# Altium PCB ALTAIR_PD_Sergeant_V26.3b.PcbDoc (part 1 of 4)
Units mm, origin at the board's own origin, x right, y up, seen from the top; angles counter-clockwise.
Board outline 74 x 56 mm, 4 copper layers (Top Layer, Layer 1, Layer 2, Bottom Layer), stack 1.675 mm thick; 209 components, 127 nets, 625 pads, 471 vias.
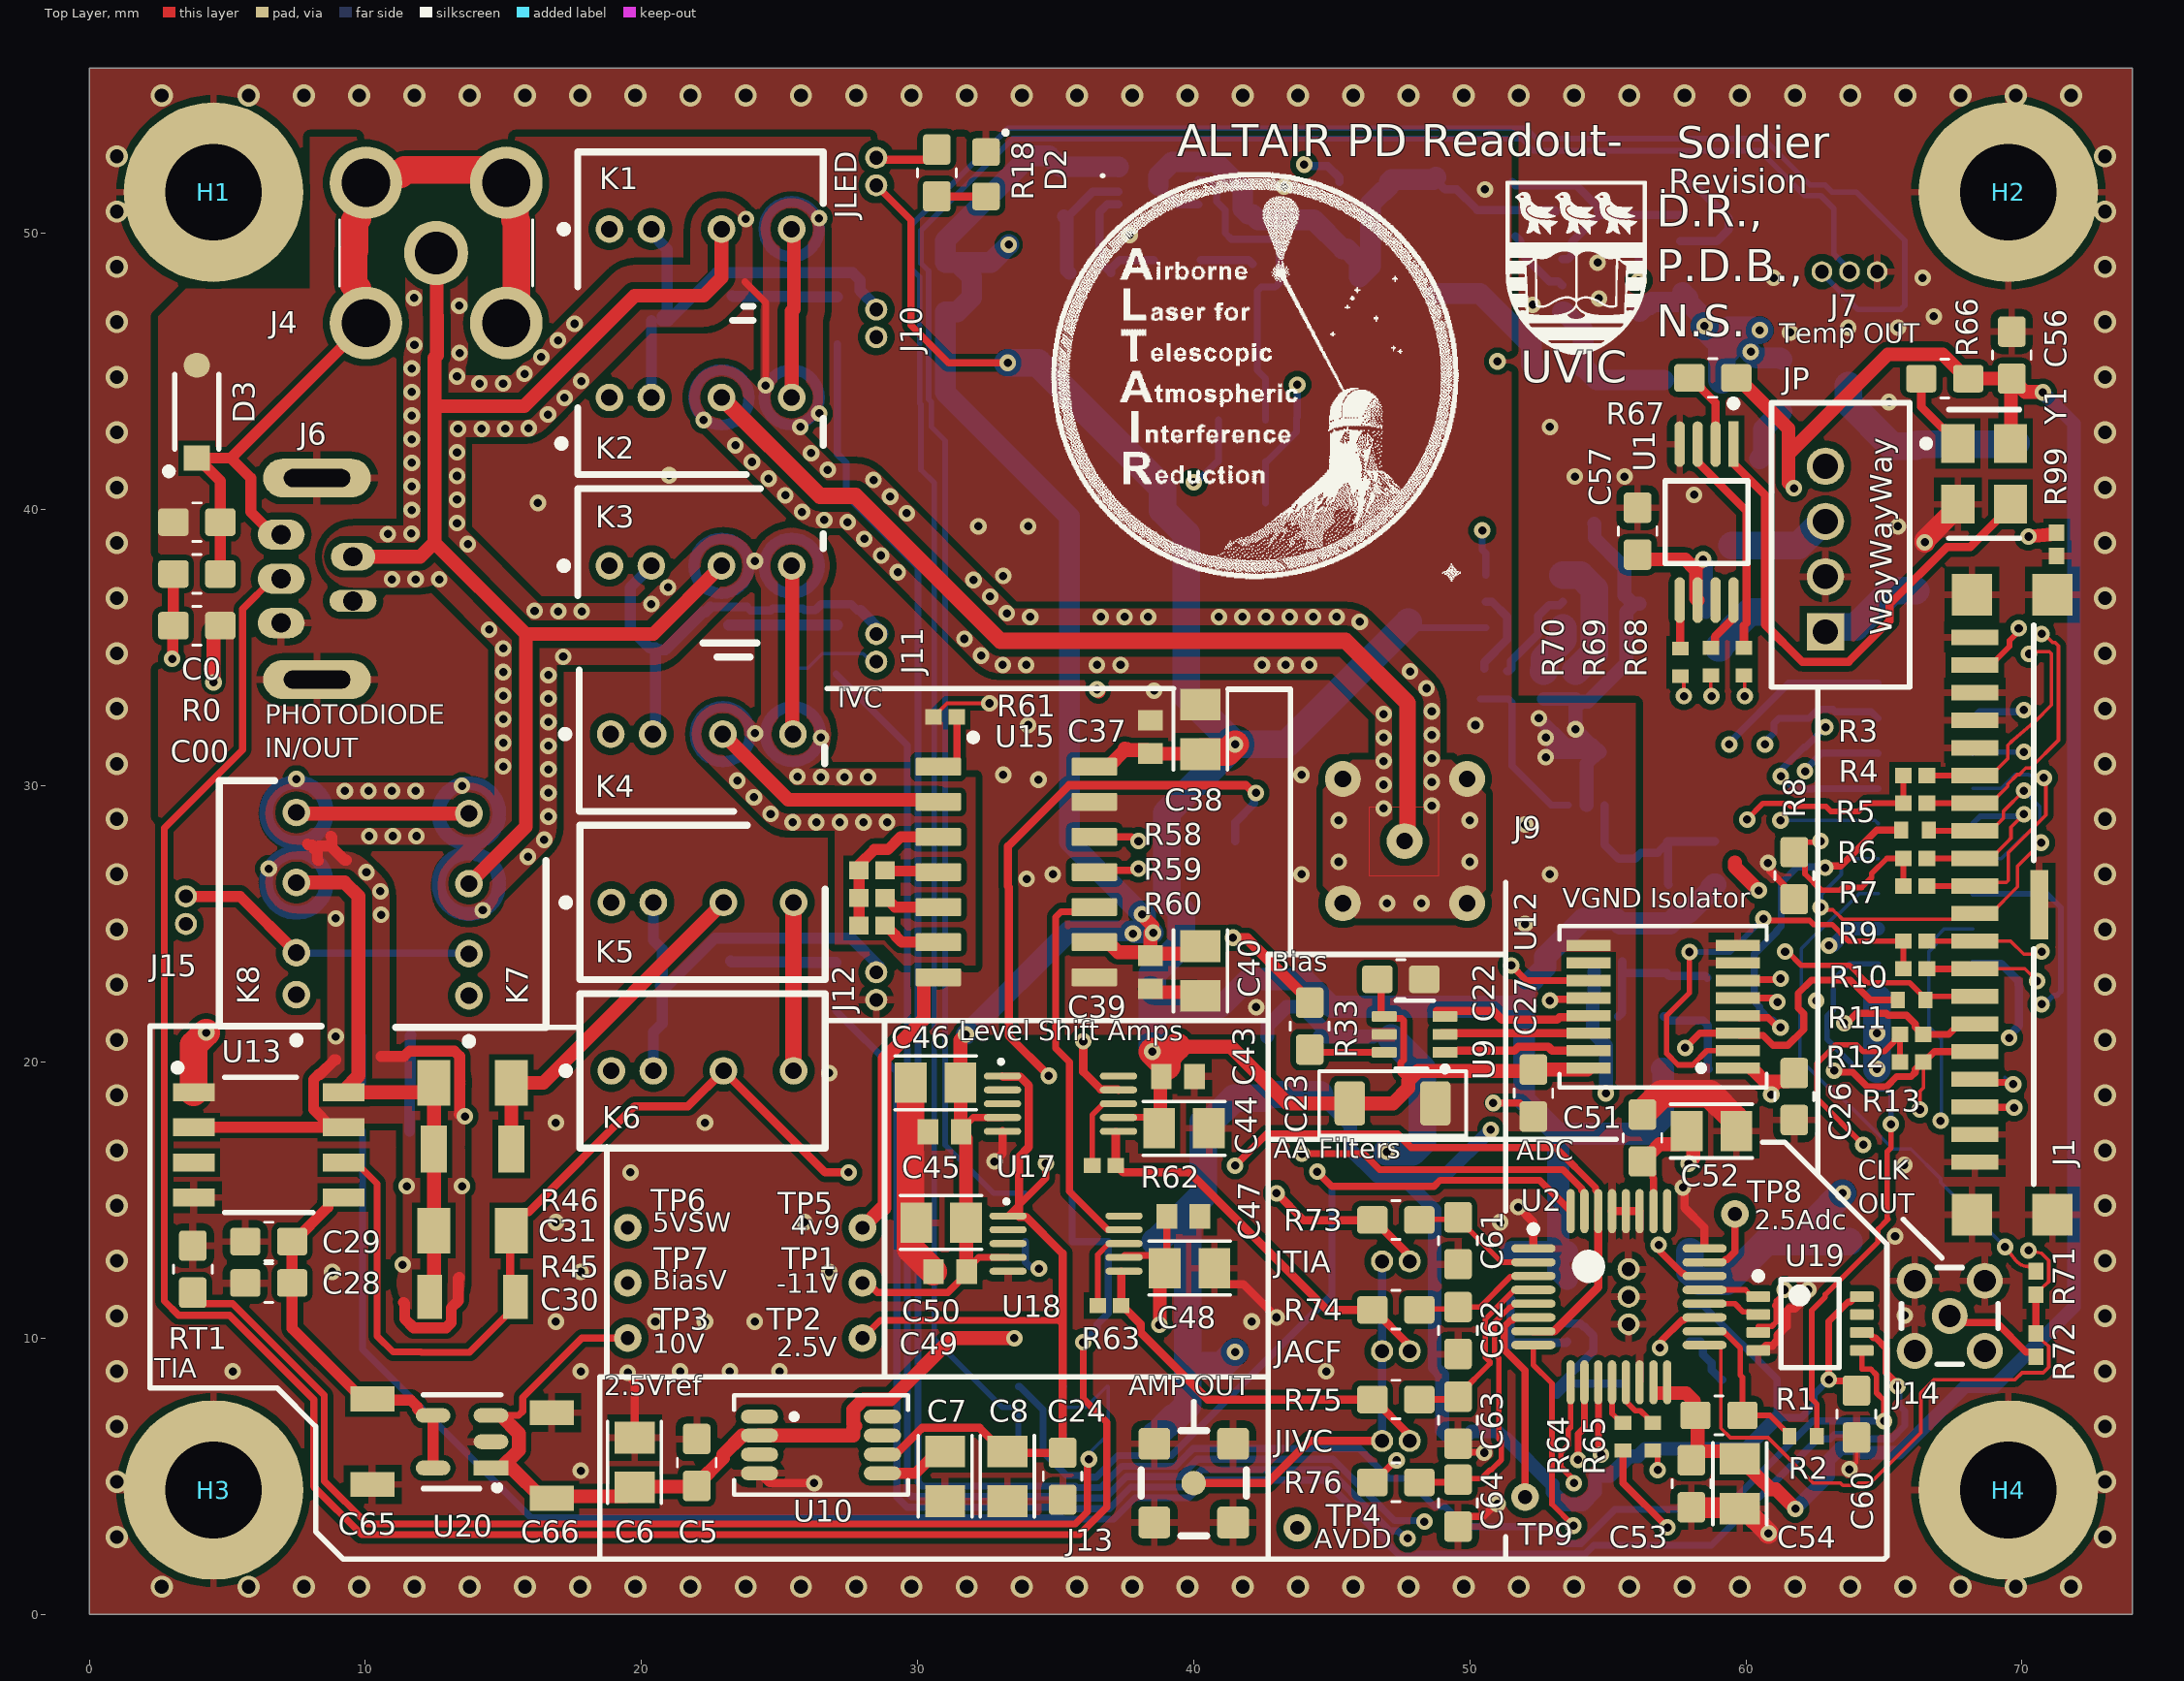
[diagram p0: Top Layer view]
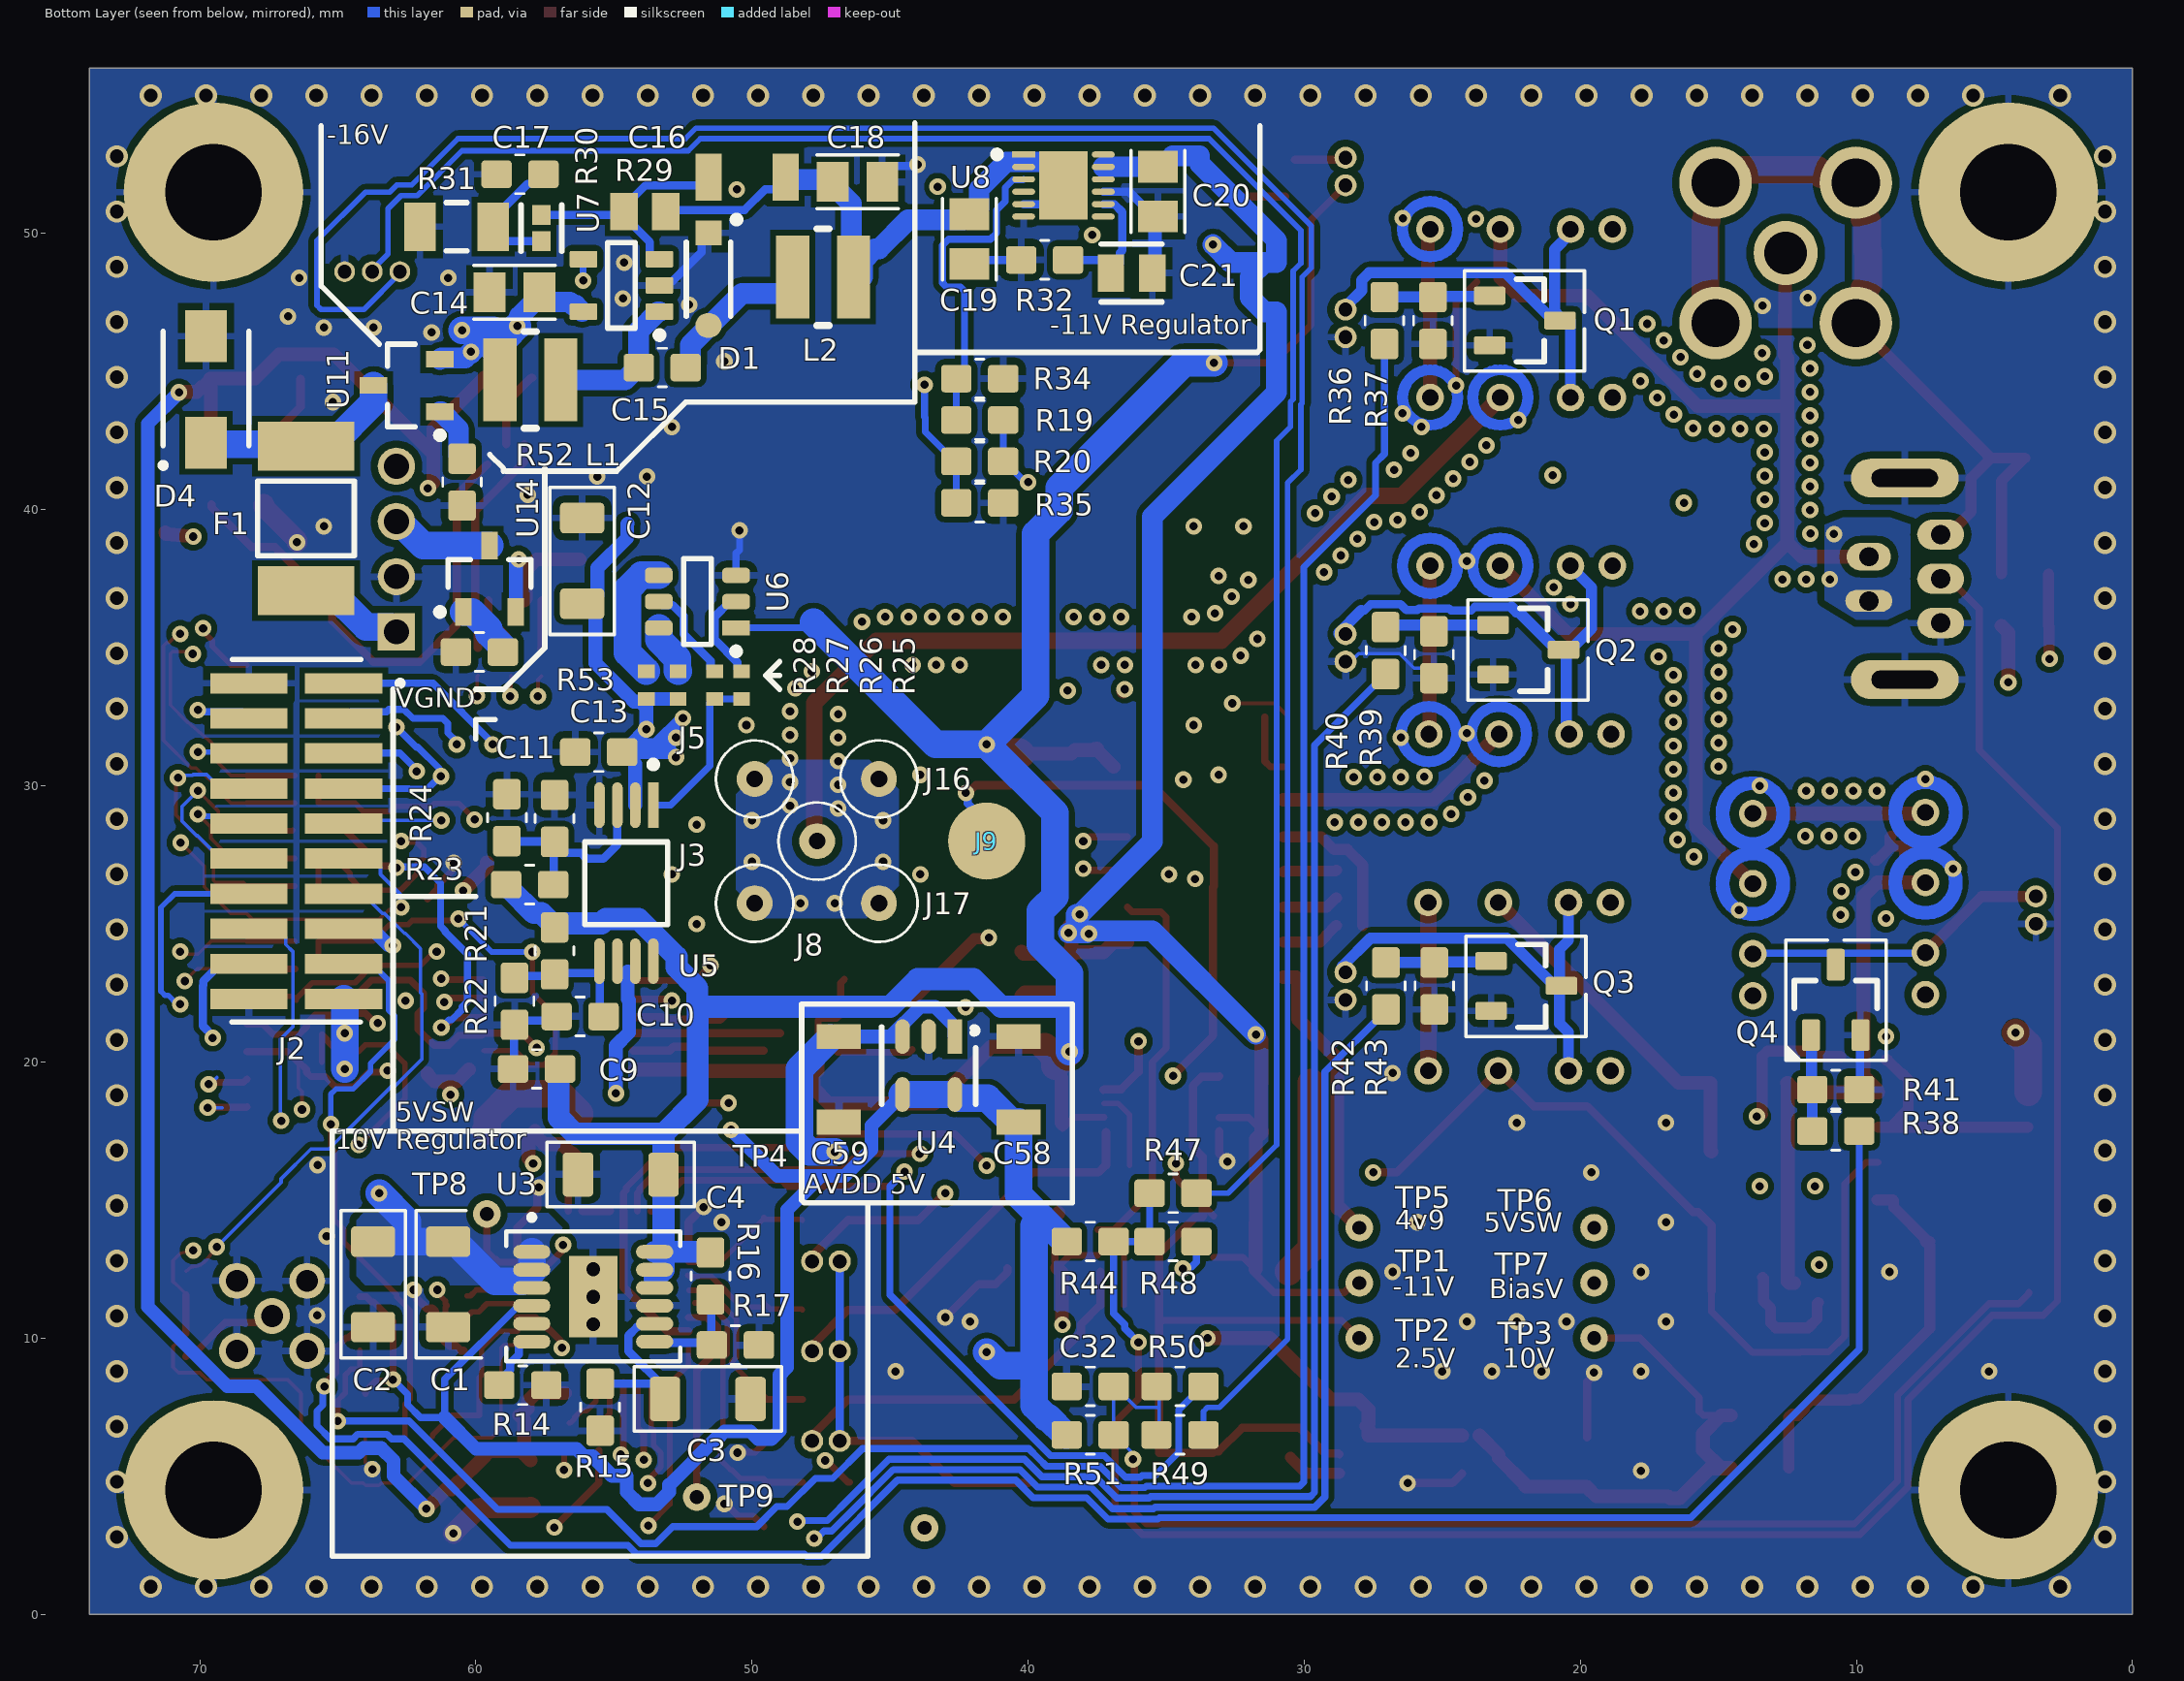
[diagram p1: Bottom Layer view, seen from below]
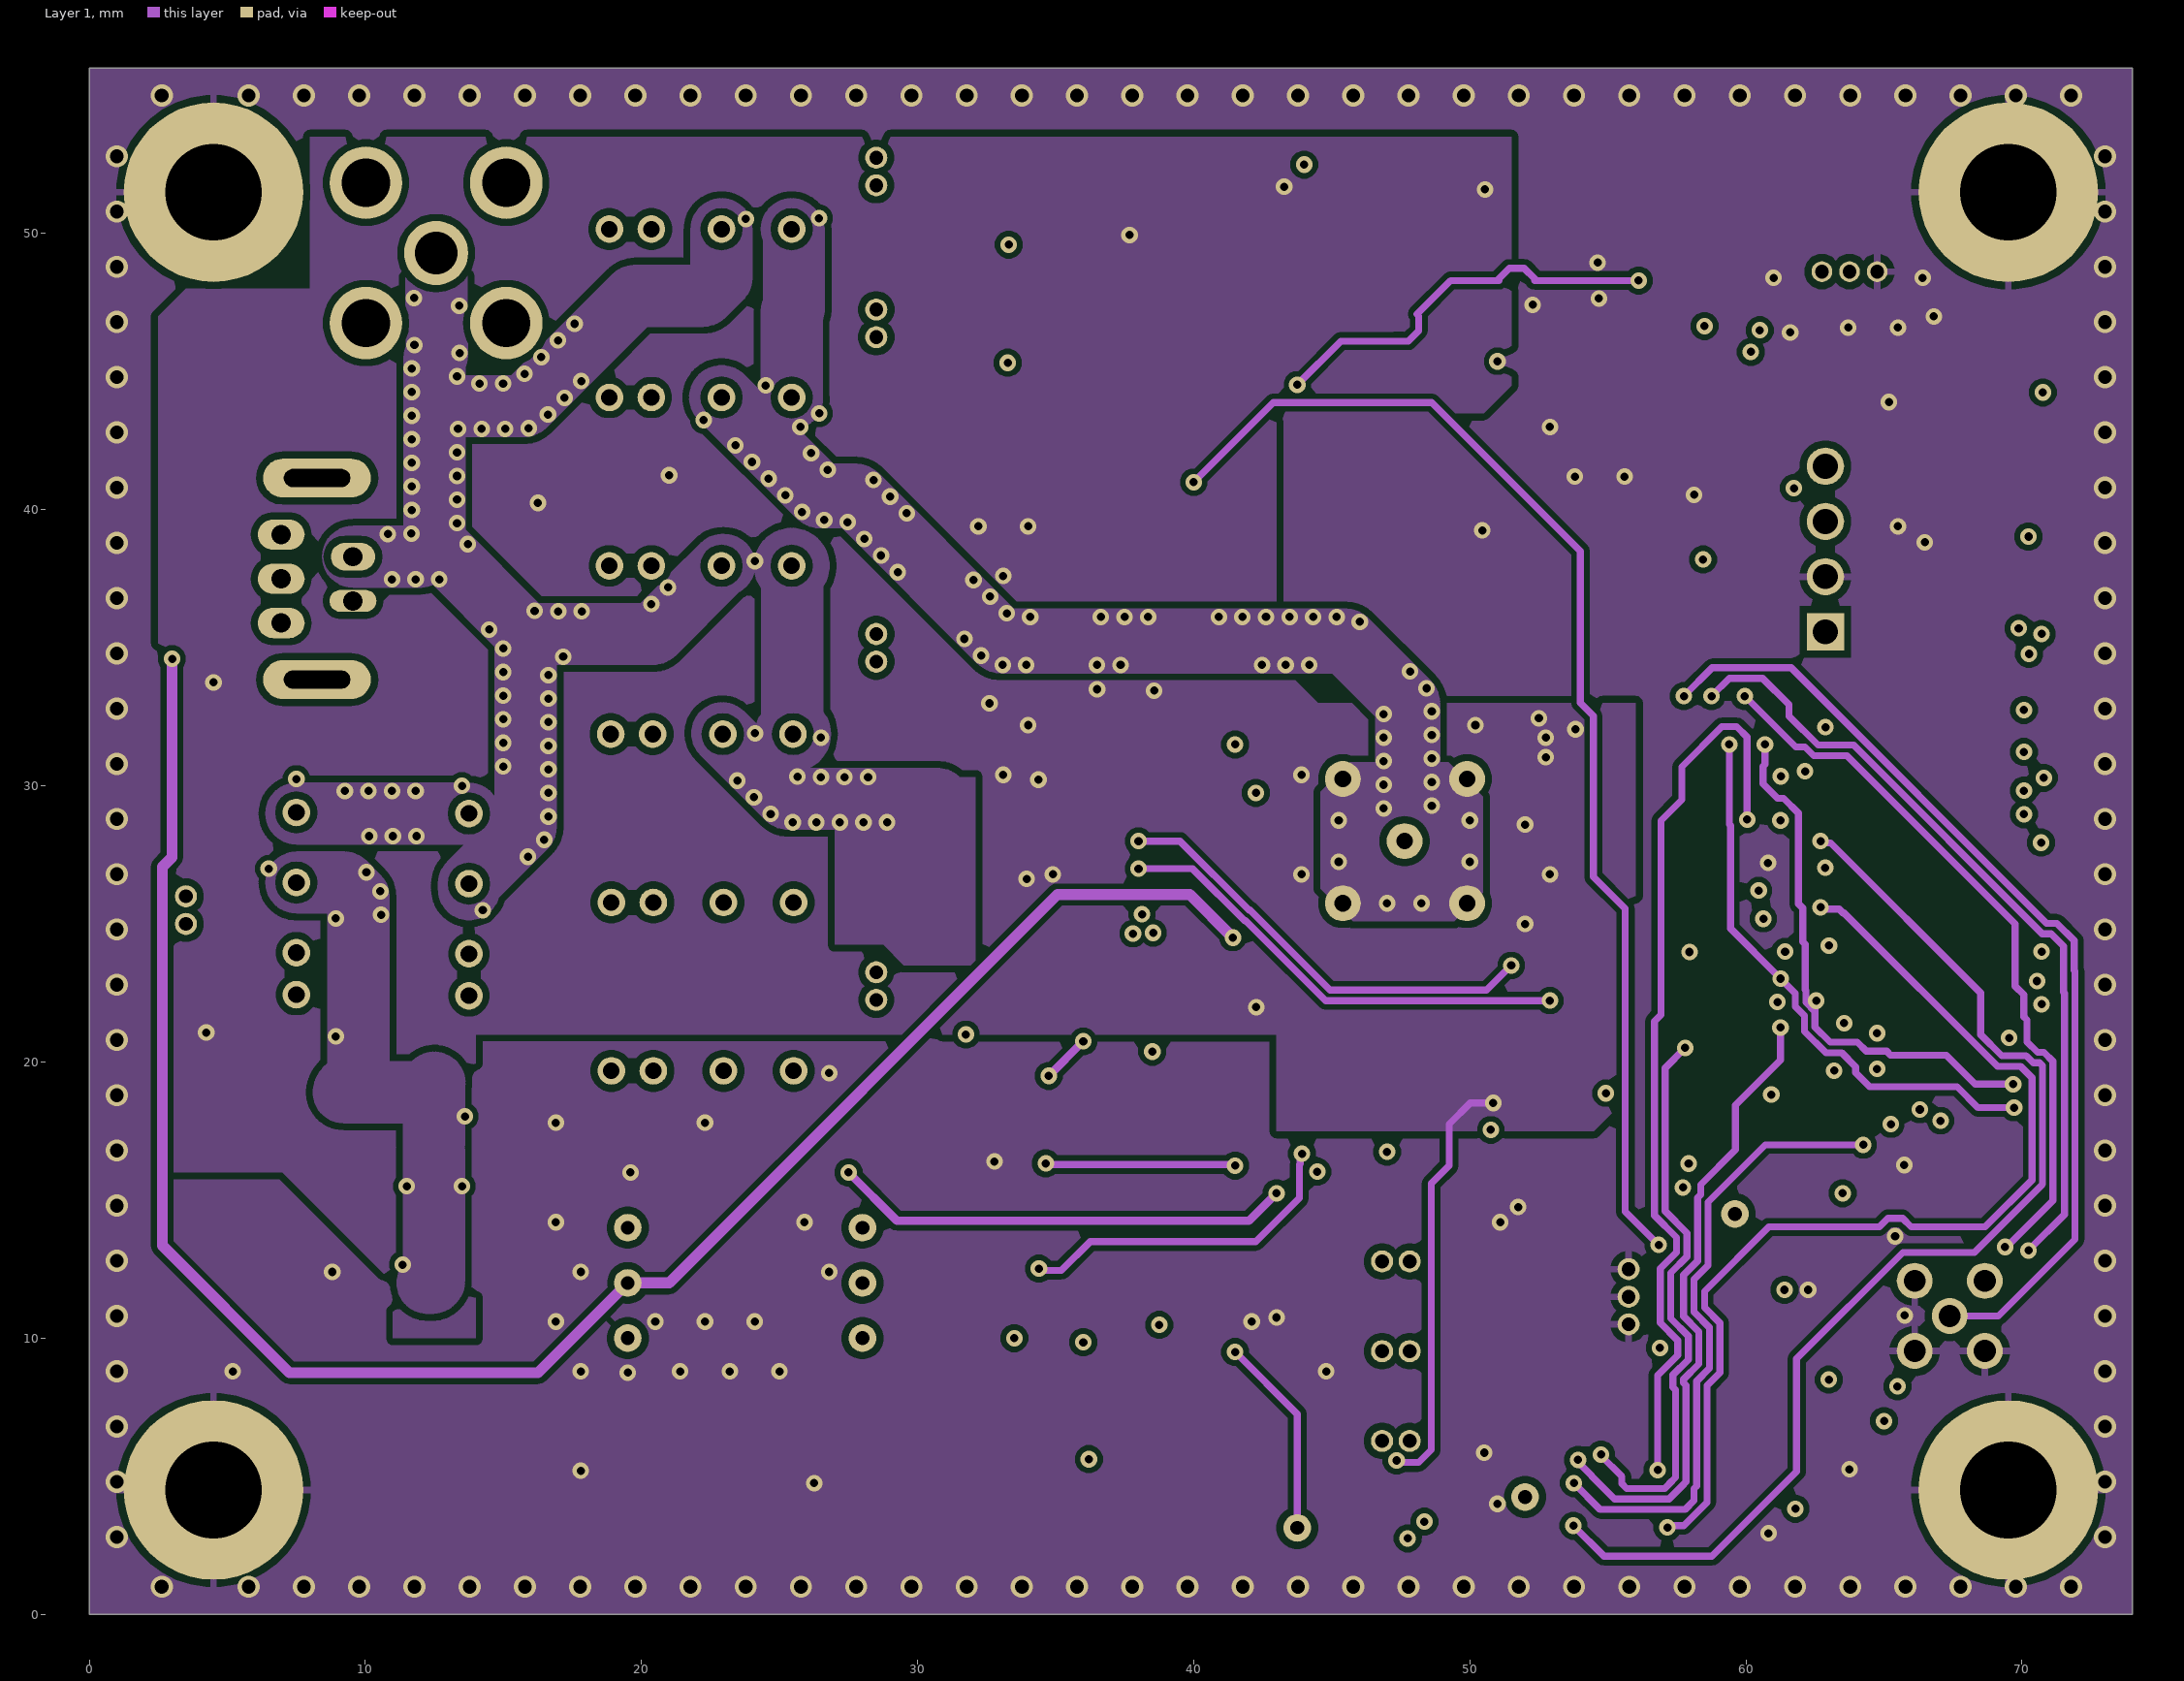
[diagram p2: Layer 1]
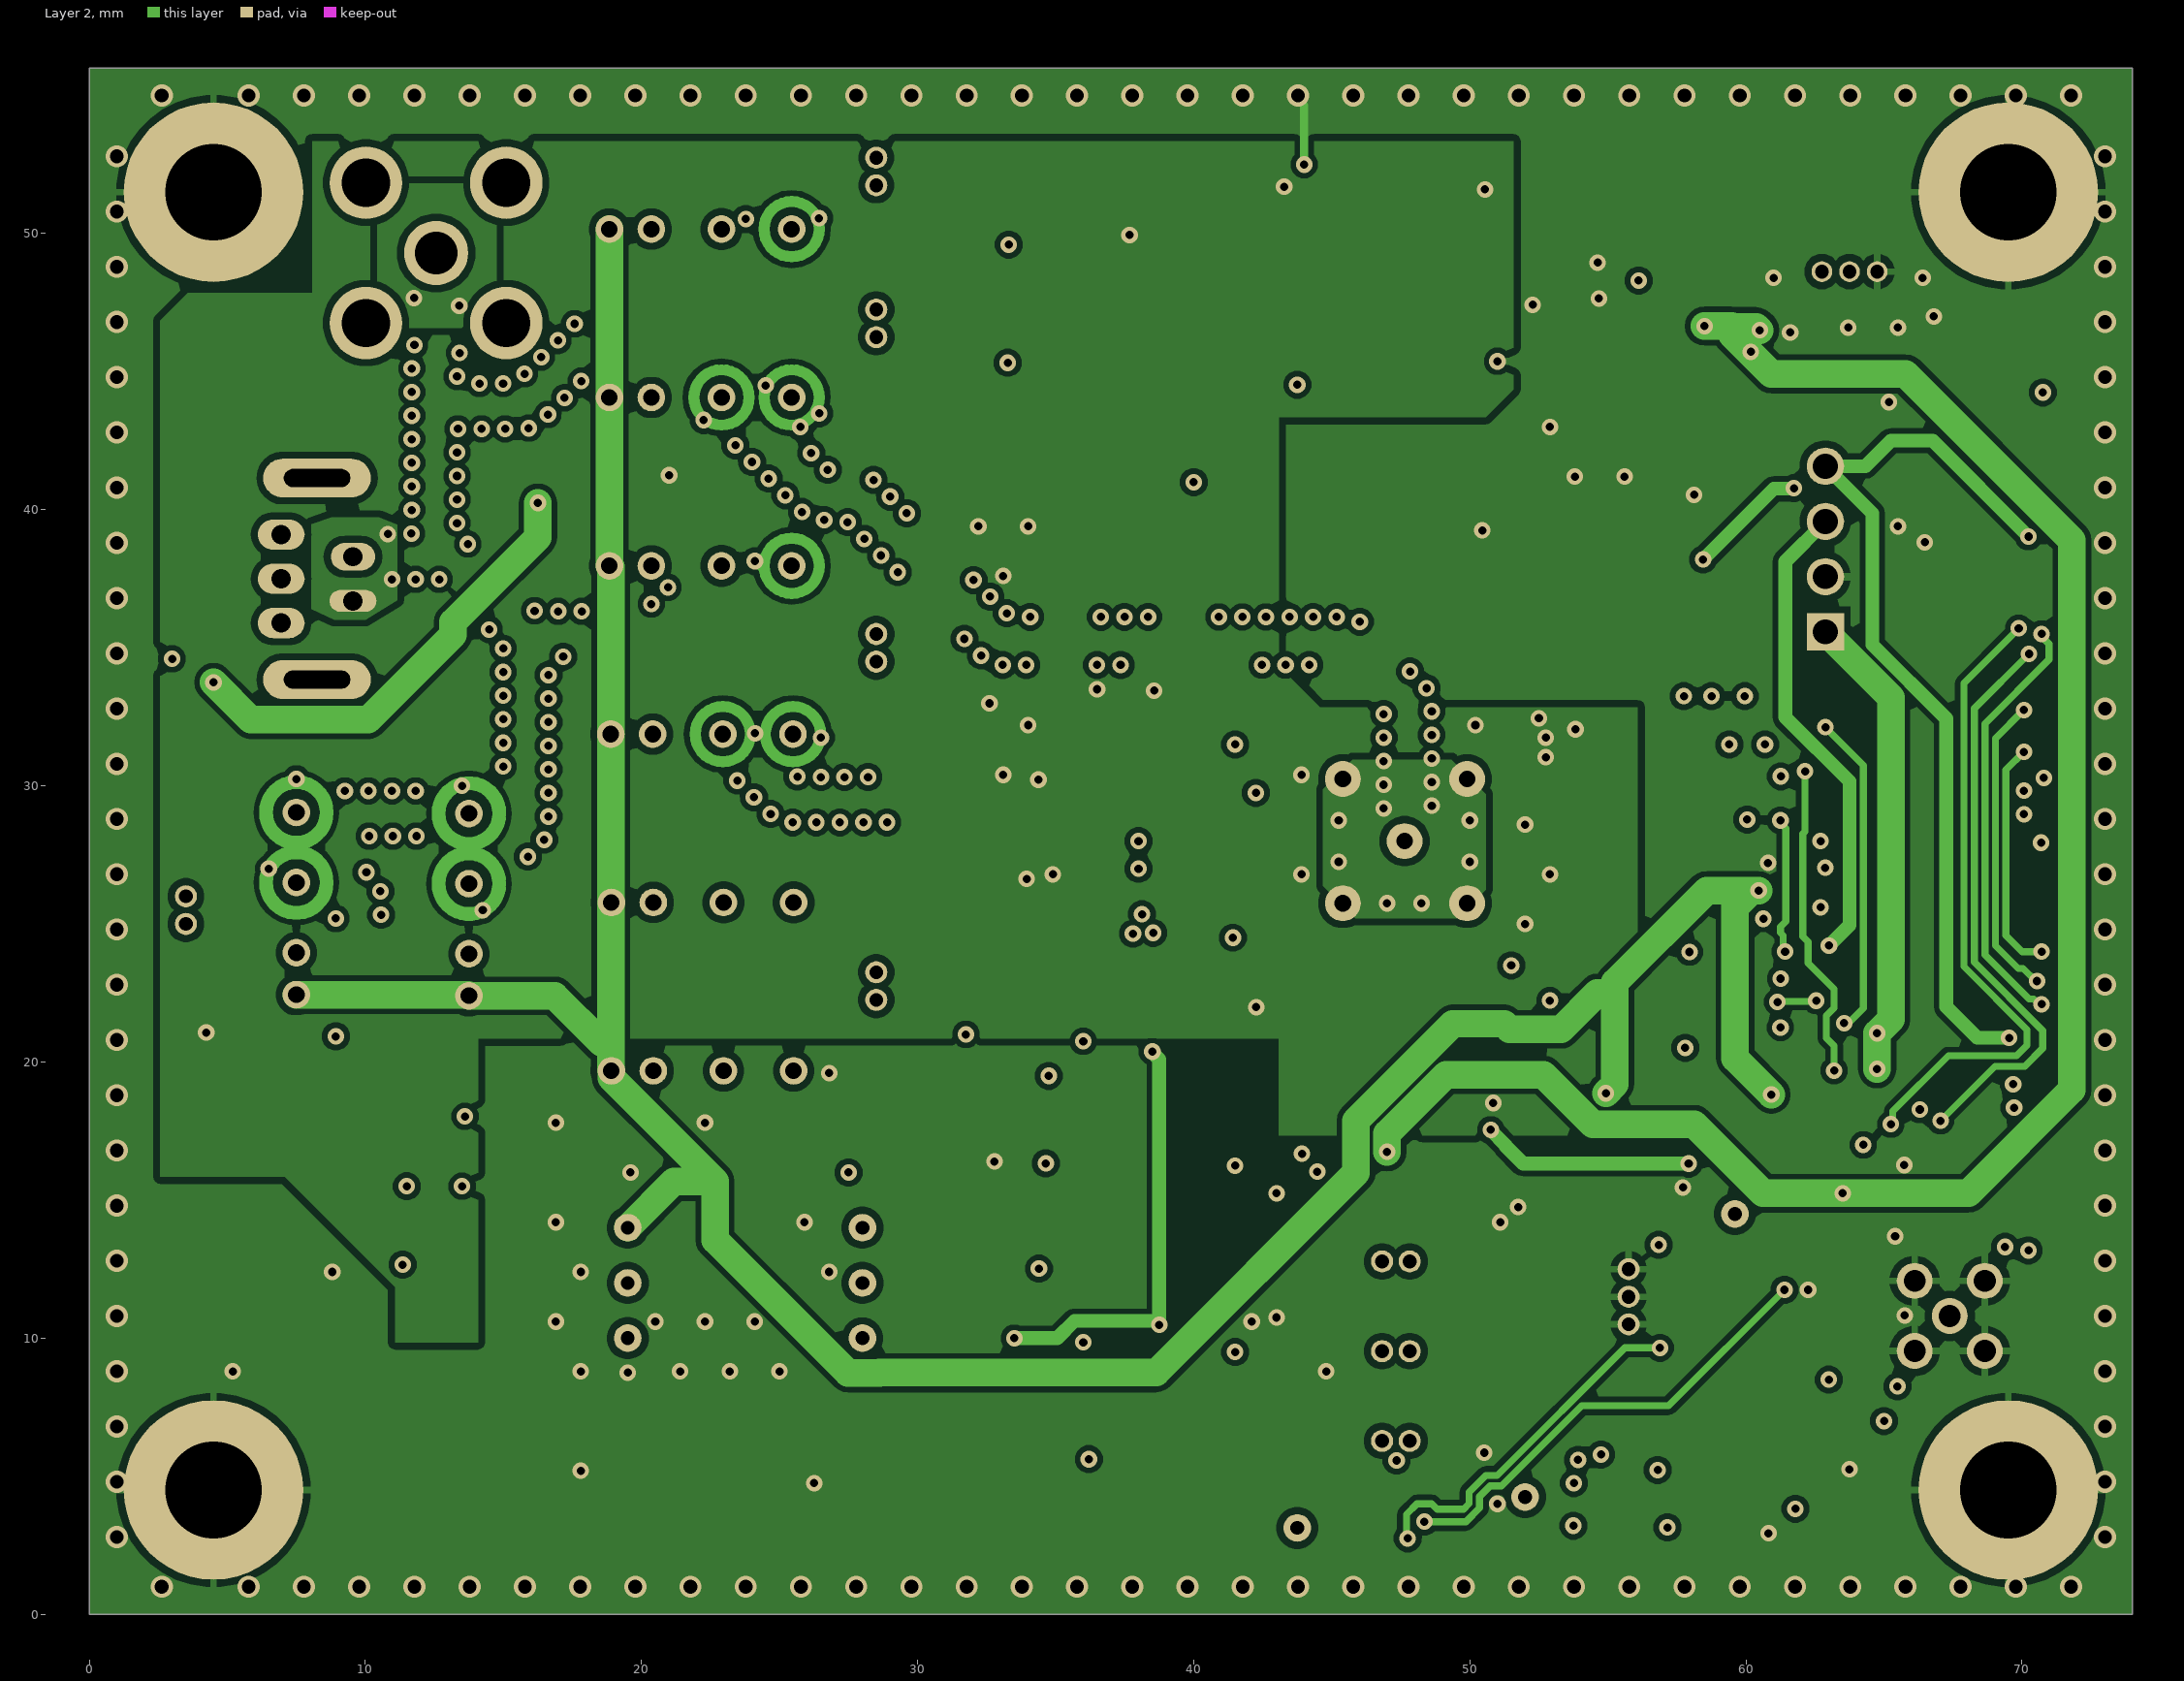
[diagram p3: Layer 2]
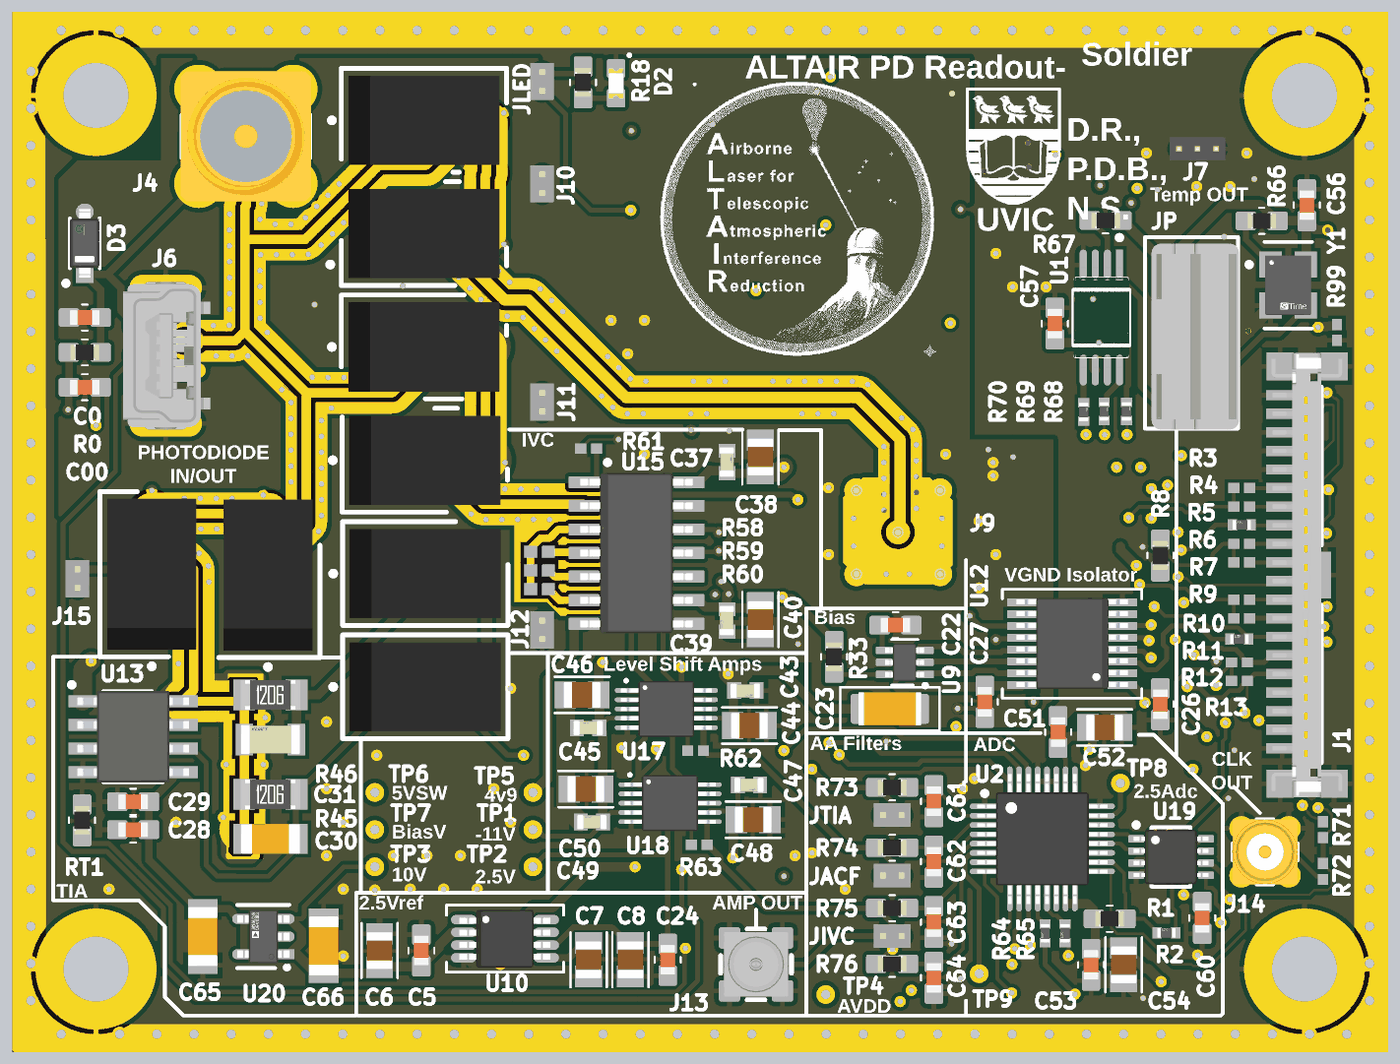
[diagram p6: 3D render of the assembled board from above, using the file's embedded part models]
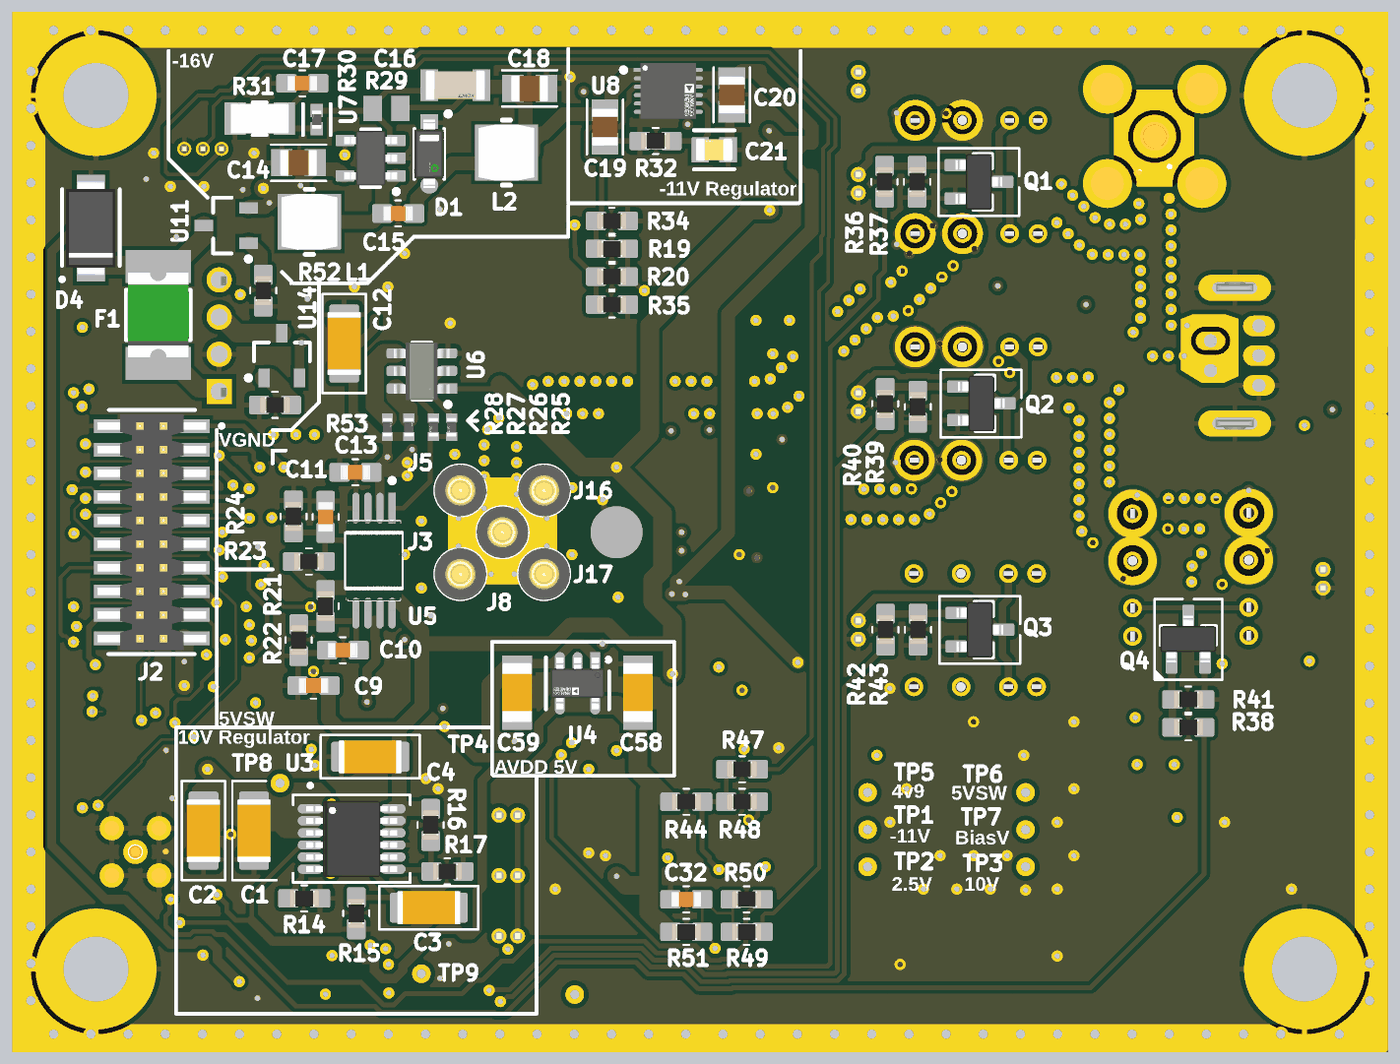
[diagram p7: 3D render of the assembled board from below, using the file's embedded part models]

## Layer stack, top to bottom
Top Solder: solder mask 0.0254, Solder Resist, Dk 3.5
Top Layer: signal copper 0.0356
Dielectric 2: prepreg 0.1702, FR-408, Dk 4.1
Layer 1: signal copper 0.035
Dielectric 1: core 1.1938, FR-408, Dk 4.8
Layer 2: signal copper 0.035
Dielectric 3: prepreg 0.1702, FR-408, Dk 4.1
Bottom Layer: signal copper 0.0356
Bottom Solder: solder mask 0.0254, Solder Resist, Dk 3.5

## Board outline
0,0 74,0 74,56 0,56

## Design rules (kind name [scope] priority, off if disabled: settings)
AssemblyTestPointUsage [All] p1: isadvanced=TRUE
AssemblyTestpoint [All] p1: isadvanced=TRUE testpointundercomponent=TRUE minsize=1.016 maxsize=2.54 preferedsize=1.524 minholesize=0 maxholesize=1.016 preferedholesize=0.813 testpointgrid=0.025 usegrid=TRUE gridtolerance=0 allowsidetop=TRUE allowsidebottom=TRUE
Clearance ViaNotInPad [IsVia vs IsPad and not InPadClass('AllowVia')] p1: isadvanced=TRUE gap=0.152 ignorepadtopadclearanceinfootprint=FALSE
Clearance SoldierGuard [InNamedPolygon('SOLDIER_GUARD_L01_P001')] p2 off: isadvanced=TRUE gap=0.19 ignorepadtopadclearanceinfootprint=FALSE
Clearance UsbGuard [InNamedPolygon('GUARD_L02_P002') or InNamedPolygon('GUARD_L03_P002') or InNamedPolygon('GUARD_LBS_P001')] p3: isadvanced=TRUE gap=0.2 ignorepadtopadclearanceinfootprint=FALSE
Clearance Clearance_3 [InNamedPolygon('SYS_DVDD_L01_P001') or InNamedPolygon('SYS_DVDD_L03_P001')] p4 off: isadvanced=TRUE gap=0.25 ignorepadtopadclearanceinfootprint=FALSE
Clearance Clearance_1 [(ExistsOnLayer('Layer 1') Or ExistsOnLayer('Layer 2')) vs (ExistsOnLayer('Layer 1') Or ExistsOnLayer('Layer 2'))] p5: gap=0.2 ignorepadtopadclearanceinfootprint=TRUE except(0: Arc-Hole Track-Hole SMDPad-Hole THPad-Hole Via-Hole Fill-Hole Poly-Hole Region-Hole Text-Hole; 0.127: Arc-Arc Arc-Track Arc-SMDPad Arc-Text Track-Track Track-SMDPad Track-Text SMDPad-SMDPad SMDPad-Text Text-Text; 0.22: Arc-Via Track-Via Via-Text; 0.254: Arc-THPad Track-THPad SMDPad-THPad SMDPad-Via THPad-THPad THPad-Via THPad-Fill THPad-Poly THPad-Region THPad-Text Via-Via Fill-Fill Fill-Poly Fill-Region Poly-Poly Poly-Region Region-Region Hole-Hole) sourcerule=53 cellrowname=All cellrowtype=0 cellcolname=All cellcoltype=0 innerlayers=TRUE
Clearance Clearance_2 [(ExistsOnLayer('Top Layer') Or ExistsOnLayer('Bottom Layer')) vs (ExistsOnLayer('Top Layer') Or ExistsOnLayer('Bottom Layer'))] p6: gap=0.2 ignorepadtopadclearanceinfootprint=TRUE except(0: Arc-Hole Track-Hole SMDPad-Hole THPad-Hole Via-Hole Fill-Hole Poly-Hole Region-Hole Text-Hole; 0.127: Arc-Arc Arc-Track Arc-SMDPad Arc-Text Track-Track Track-SMDPad Track-Text SMDPad-SMDPad SMDPad-Text Text-Text; 0.22: Arc-Via Track-Via Via-Text; 0.254: Arc-THPad Track-THPad SMDPad-THPad SMDPad-Via THPad-THPad THPad-Via THPad-Fill THPad-Poly THPad-Region THPad-Text Via-Via Fill-Fill Fill-Poly Fill-Region Poly-Poly Poly-Region Region-Region Hole-Hole) sourcerule=53 cellrowname=All cellrowtype=0 cellcolname=All cellcoltype=0 outerlayers=TRUE
Clearance [All] p7: gap=0.254 ignorepadtopadclearanceinfootprint=TRUE ismatrix=TRUE
ComponentClearance [All] p1: isadvanced=TRUE gap=0.254 collisioncheckmode=3 verticalgap=0.254 showdistances=FALSE
FabricationTestPointUsage [All] p1: isadvanced=TRUE valid=0 allowmultiple=FALSE
FabricationTestpoint [All] p1: isadvanced=TRUE side=3 testpointundercomponent=TRUE minsize=1.016 maxsize=2.54 preferedsize=1.524 minholesize=0 maxholesize=1.016 preferedholesize=0.813 testpointgrid=0.025 allowsidetop=TRUE allowsidebottom=TRUE usegrid=TRUE gridtolerance=0
FanoutControl Fanout_BGA [IsBGA] p1: isadvanced=TRUE bgadir=Out bgaviamode=Centered fanoutstyle=Auto fanoutdirection=Alternating viagrid=0.025 // Fanout_BGA (Default Rule)
FanoutControl Fanout_LCC [IsLCC] p2: isadvanced=TRUE bgadir=Out bgaviamode=Centered fanoutstyle=Auto fanoutdirection=Alternating viagrid=0.025 // Fanout_LCC (Default Rule)
FanoutControl Fanout_SOIC [IsSOIC] p3: isadvanced=TRUE bgadir=Out bgaviamode=Centered fanoutstyle=Auto fanoutdirection=Alternating viagrid=0.025 // Fanout_SOIC (Default Rule)
FanoutControl Fanout_Small [(CompPinCount < 5)] p4: isadvanced=TRUE bgadir=Out bgaviamode=Centered fanoutstyle=Auto fanoutdirection=OutThenIn viagrid=0.025 // Fanout_Small (Default Rule)
FanoutControl Fanout_Default [All] p5: isadvanced=TRUE bgadir=Out bgaviamode=Centered fanoutstyle=Auto fanoutdirection=Alternating viagrid=0.025 // Fanout_Default (Default Rule)
Height [All] p1: isadvanced=TRUE minheight=0 maxheight=25.4 prefheight=12.7
HoleSize [All] p1: isadvanced=TRUE absolutevalues=TRUE maxlimit=4 minlimit=0.2 maxpercent=80.000 minpercent=20.000
HoleToHoleClearance [All] p1: isadvanced=TRUE gap=0.407 allowstackedmicrovias=TRUE // From PCBWay Advanced Capabilities
LayerPairs [All] p1: isadvanced=TRUE enforce=TRUE
MinimumSolderMaskSliver [All] p1: isadvanced=TRUE minsoldermaskwidth=0.076 // From PCBWay Advanced Capabilities
NetAntennae [All] p1 off: isadvanced=TRUE netantennaetolerance=0
PasteMaskExpansion [All] p1: isadvanced=TRUE expansion=0
PlaneClearance [All] p1: isadvanced=TRUE clearance=0.508
PlaneConnect [All] p1: isadvanced=TRUE planeconnectstyle=Relief reliefexpansion=0.508 reliefentries=4 reliefconductorwidth=0.254 reliefairgap=0.254
PolygonConnect PolygonConnectStyle_DCV [InPolygonClass('DirectConnectVias')] p1: isadvanced=TRUE thpad.connectstyle=Relief thpad.reliefconductorwidth=0.254 thpad.reliefentries=4 thpad.polygonreliefangle="90 Angle" thpad.airgapwidth=0.254 smdpad.connectstyle=Relief smdpad.reliefconductorwidth=0.254 smdpad.reliefentries=4 smdpad.polygonreliefangle="90 Angle" smdpad.airgapwidth=0.254 via.connectstyle=Direct via.reliefconductorwidth=0.254 via.reliefentries=2 via.polygonreliefangle="0 Angle" via.airgapwidth=0.254
PolygonConnect PolygonConnectStyle_DCE [InPolygonClass('DirectConnectEverything')] p2: isadvanced=TRUE connectstyle=Direct reliefconductorwidth=0.254 reliefentries=2 polygonreliefangle="0 Angle" airgapwidth=0.254
PolygonConnect [All] p3: connectstyle=Relief reliefconductorwidth=0.254 reliefentries=4 polygonreliefangle="90 Angle" airgapwidth=0.254
RoutingCorners [All] p1: isadvanced=TRUE cornerstyle=45-Degree minsetback=2.54 maxsetback=2.54
RoutingPriority [All] p1: isadvanced=TRUE routingpriority=0
RoutingVias RoutingViaStyle_3 [All] p1: isadvanced=TRUE holewidth=0.3 width=0.6 viastyle="Through Hole" minholewidth=0.3 minwidth=0.6 maxholewidth=0.711 maxwidth=1.27
RoutingVias [All] p2: holewidth=0.711 width=1.27 viastyle="Through Hole" minholewidth=0.711 minwidth=1.27 maxholewidth=0.711 maxwidth=1.27
ShortCircuit [All] p1: isadvanced=TRUE allowed=FALSE
SilkToSilkClearance [All] p1 off: isadvanced=TRUE silktosilkclearance=0.254
SilkToSolderMaskClearance [IsPad or IsPoly] p1: isadvanced=TRUE minsilkscreentomaskgap=0.15 clearancetoexposedcopper=TRUE
SolderMaskExpansion ExposeGuard [InNet('PD_A')] p1: isadvanced=TRUE expansion=1 istentingtop=FALSE
SolderMaskExpansion [All] p2: isadvanced=TRUE expansion=0 istentingtop=FALSE
SupplyNets "Schematic Supply Nets_5" [InNet('3V3')] p1: voltage=0.000
SupplyNets "Schematic Supply Nets_4" [InNet('AVDD')] p2: isadvanced=TRUE voltage=0.000
SupplyNets "Schematic Supply Nets" [InNet('5VTIA')] p3: isadvanced=TRUE voltage=0.000
SupplyNets "Schematic Supply Nets_9" [InNet('A2V5')] p4: isadvanced=TRUE voltage=0.000
SupplyNets "Schematic Supply Nets_8" [InNet('-11V')] p5: isadvanced=TRUE voltage=0.000
SupplyNets "Schematic Supply Nets_7" [InNet('4V9')] p6: isadvanced=TRUE voltage=0.000
SupplyNets "Schematic Supply Nets_6" [InNet('10V')] p7: isadvanced=TRUE voltage=0.000
SupplyNets "Schematic Supply Nets_2" [InNet('SYS_GND')] p8: isadvanced=TRUE voltage=0.000
SupplyNets "Schematic Supply Nets_1" [InNet('A5VSW')] p9: isadvanced=TRUE voltage=0.000
UnRoutedNet [All] p1: isadvanced=TRUE
UnpouredPolygon [All] p1: isadvanced=TRUE
Width [All] p1: maxlimit=5 minlimit=0.127 preferedwidth=0.254 midlayer1_minwidth=0.254 midlayer2_minwidth=0.254 minimp=50.000000 maximp=50.000000 favimp=50.000000
4 further rules are at their usual default settings.

## Classes and differential pairs
pad class AllowVia: H1-1 H2-1 H3-1 H4-1 J6-4
polygon class DirectConnectVias: SYS_GND_L01_P281 SYS_GND_L02_P001 SYS_GND_L03_P001 SYS_GND_L04_P001
polygon class DirectConnectEverything: 4V9_L01_P280 4V9_L02_P255 4V9_L03_P257 "Abstract polygon ID" ACFGUARD GUARD_L01_P279 GUARD_L02_P238 GUARD_L04_P001 GUARD_L04_P002 GUARD_L04_P003 InterconGuard IVC_GUARD_SUB NETJ9_1_L01_P278 PDOUTGUARD SOLDIER_GUARD_L02_P001 SOLDIER_GUARD_L03_P001 SYS_GND_L01_P281 SYS_GND_L02_P001 SYS_GND_L03_P001 SYS_GND_L04_P001 TIA_GUARD_SUB TIAGUARD VBAT_L04_P002
component class TIA1: C0 C00 C22 C23 C28 C29 C30 C31 C32 D3 J4 J6 J7 J10 J11 J12 J15 K1 K2 K3 K4 K5 K6 K7 K8 Q1 Q2 Q3 Q4 R0 R33 R36 R37 R38 R39 R40 R41 R42 R43 R44 R45 R46 R47 R48 R49 R50 R51 RT1 TP7 U9 U13
component class PWR1: C1 C2 C3 C4 C5 C6 C7 C8 C9 C10 C11 C12 C13 C14 C15 C16 C17 C18 C19 C20 C21 C24 C58 C59 C65 C66 D1 D2 JLED L1 L2 R14 R15 R16 R17 R18 R19 R20 R21 R22 R23 R24 R25 R26 R27 R28 R29 R30 R31 R32 R34 R35 TP1 TP2 TP3 TP4 TP5 TP6 U3 U4 U5 U6 U7 U8 U10 U20
component class INT1: C37 C38 C39 C40 J3 J5 J8 J9 J16 J17 R58 R59 R60 R61 U15
component class BIO1: C26 C27 D4 F1 H1 H2 H3 H4 J1 J2 JP R1 R2 R3 R4 R5 R6 R7 R8 R9 R10 R11 R12 R13 R52 R53 R99 U11 U12 U14
component class ADC1: C43 C44 C45 C46 C47 C48 C49 C50 C51 C52 C53 C54 C56 C57 C60 C61 C62 C63 C64 J13 J14 JACF JIVC JTIA R62 R63 R64 R65 R66 R67 R68 R69 R70 R71 R72 R73 R74 R75 R76 TP8 TP9 U1 U2 U17 U18 U19 Y1

## Components (designator, comment, footprint, x,y, rotation, side; value= is the part's Value field where it differs from the comment)
C00 "TBD OPT" "CAP 0603 IPC MID DENSITY" 3.897,35.801 r180 top
C0 "TBD OPT" "CAP 0603 IPC MID DENSITY" 3.897,39.551 r0 top
C1 "10uF" "CAP 1206 IPC LOW DENSITY" 61,11.947 r90 bottom
C2 "10uF" "CAP 1206 IPC LOW DENSITY" 63.718,11.947 r90 bottom
C3 "10uF" "CAP 1206 IPC LOW DENSITY" 51.6,7.8 r0 bottom
C4 "10uF" "CAP 1206 IPC LOW DENSITY" 54.75,15.925 r180 bottom
C5 "0.1uF" "CAP 0603 IPC MID DENSITY" 22,5.5 r90 top
C6 "10uF" "CAP 0805 IPC MID DENSITY" 19.75,5.5 r270 top
C7 "10uF" "CAP 0805 IPC MID DENSITY" 31,5 r270 top
C8 "10uF" "CAP 0805 IPC MID DENSITY" 33.25,5 r90 top
C9 "1uF" "CAP 0603 IPC MID DENSITY" 57.8,19.75 r180 bottom
C10 "0.1uF" "CAP 0603 IPC MID DENSITY" 56.225,21.65 r180 bottom
C11 "0.1uF" "CAP 0603 IPC MID DENSITY" 57.15,28.825 r270 bottom
C12 "10uF" "CAP 1206 IPC LOW DENSITY" 56.15,38.15 r270 bottom
C13 "0.1uF" "CAP 0603 IPC MID DENSITY" 55.55,31.225 r180 bottom
C14 "10uF" "CAP 0805 IPC MID DENSITY" 58.6,47.875 r180 bottom
C15 "1uF" "CAP 0603 IPC MID DENSITY" 53.25,45.15 r180 bottom
C16 "330pF" "CAP 1206 NON-IPC KEMET NP0" 50.175,52.05 r0 bottom
C17 "1uF DNP" "CAP 0603 IPC MID DENSITY" 58.4,52.15 r0 bottom
C18 "10uF" "CAP 0805 IPC MID DENSITY" 46.175,51.875 r180 bottom
C19 "10uF" "CAP 0805 IPC MID DENSITY" 42.125,49.8 r270 bottom
C20 "10uF" "CAP 0805 IPC MID DENSITY" 35.3,51.525 r270 bottom
C21 "4.7uF" "CAP 0805 NON-IPC KEMET X5R" 36.25,48.575 r180 bottom
C22 "0.1uF" "CAP 0603 IPC MID DENSITY" 47.5,23 r180 top
C23 "10uF" "CAP 1206 IPC LOW DENSITY" 47.2,18.5 r180 top
C24 "0.1uF" "CAP 0603 IPC MID DENSITY" 35.25,5 r270 top
C26 "0.1uF" "CAP 0603 IPC MID DENSITY" 61.75,18.75 r90 top
C27 "0.1uF" "CAP 0603 IPC MID DENSITY" 52.301,18.875 r90 top
C28 "1uF" "CAP 0603 IPC MID DENSITY" 6.5,12 r0 top
C29 "0.1uF" "CAP 0603 IPC MID DENSITY" 6.5,13.5 r0 top
C30 "10pF" "CAP 1206 UNKNOWN" 13.883,11.5 r0 top
C31 "300pF" "CAP 1206 NON-IPC KEMET NP0" 13.883,16.85 r0 top
C32 "0.1uF" "CAP 0603 IPC MID DENSITY" 37.75,8.25 r180 bottom
C37 "0.1uF" "CAP 0603 NON-IPC KEMET X7R" 38.432,31.775 r270 top
C38 "10uF" "CAP 0805 IPC MID DENSITY" 40.24,32.05 r270 top
C39 "0.1uF" "CAP 0603 NON-IPC KEMET X7R" 38.432,23.25 r90 top
C40 "10uF" "CAP 0805 IPC MID DENSITY" 40.24,23.3 r90 top
C43 "0.1uF" "CAP 0603 NON-IPC KEMET X7R" 39.425,19.475 r180 top
C44 "10uF" "CAP 0805 IPC MID DENSITY" 39.65,17.6 r180 top
C45 "0.1uF" "CAP 0603 NON-IPC KEMET X7R" 30.975,17.475 r0 top
C46 "10uF" "CAP 0805 IPC MID DENSITY" 30.65,19.25 r0 top
C47 "0.1uF" "CAP 0603 NON-IPC KEMET X7R" 39.625,14.41 r180 top
C48 "10uF" "CAP 0805 IPC MID DENSITY" 39.85,12.535 r180 top
C49 "0.1uF" "CAP 0603 NON-IPC KEMET X7R" 31.175,12.41 r0 top
C50 "10uF" "CAP 0805 IPC MID DENSITY" 30.85,14.185 r0 top
C51 "0.1uF" "CAP 0603 IPC MID DENSITY" 56.25,17.25 r270 top
C52 "10uF" "CAP 0805 IPC MID DENSITY" 58.75,17.5 r180 top
C53 "0.1uF" "CAP 0603 IPC MID DENSITY" 58.021,4.729 r90 top
C54 "10uF" "CAP 0805 IPC MID DENSITY" 59.775,4.729 r90 top
C56 "0.1uF" "CAP 0603 IPC MID DENSITY" 69.625,45.6 r270 top
C57 "0.1uF" "CAP 0603 IPC MID DENSITY" 56.075,39.225 r270 top
C58 "2.2uF" "CAP 1206 UNKNOWN" 40.35,19.375 r90 bottom
C59 "2.2uF" "CAP 1206 UNKNOWN" 46.85,19.375 r270 bottom
C60 "0.1uF" "CAP 0603 IPC MID DENSITY" 64,7.25 r90 top
C61 "2nF" "CAP 0603 IPC MID DENSITY" 49.571,13.529 r90 top
C62 "2nF" "CAP 0603 IPC MID DENSITY" 49.571,10.279 r90 top
C63 "2nF" "CAP 0603 IPC MID DENSITY" 49.571,7.029 r90 top
C64 "2nF" "CAP 0603 IPC MID DENSITY" 49.571,4.029 r90 top
C65 "2.2uF" "CAP 1206 UNKNOWN" 10.25,6.25 r270 top
C66 "2.2uF" "CAP 1206 UNKNOWN" 16.75,5.75 r90 top
D1 "MBR0520" "SOD-123 ONSEMI SMALL PADS" 51.575,48.35 r270 bottom
D2 "BLUE" "LED 0603 MID DENSITY" 32.475,52.15 r90 top
D3 "MMSZ4679 DNP" "SOD-123 ONSEMI SMALL PADS" 3.897,43.551 r90 top
D4 "SMAJ12A" "DO-214AC SMA VISHAY" 69.773,44.357 r90 bottom
F1 "0ZCG0030FF2C" "POLYFUSE 1812 NON-IPC BELFUSE" 66.15,39.69 r90 bottom
H1 "Mount-hole" "M3 PTH FOR 4.5MM HEX" 4.5,51.5 r0 top locked
H2 "Mount-hole" "M3 PTH FOR 4.5MM HEX" 69.5,51.5 r0 top locked
H3 "Mount-hole" "M3 PTH FOR 4.5MM HEX" 4.5,4.5 r0 top locked
H4 "Mount-hole" "M3 PTH FOR 4.5MM HEX" 69.5,4.5 r0 top locked
J1 "DF19-20P-1V_52_" "HEADER MALE 20x1 1MM PITCH SMD" 69.641,25.7 r270 top locked
J2 "FTSH-110-03-L-DV" "HEADER MALE 10X2 1.27MM PITCH FTSH" 66.5,28 r90 bottom
J3 "807-22-001-10-006101" "POGO PIN 807-22-001-10-006101" 49.9,25.75 r180 bottom
J4 "60312002114503" "COAX SMA THT" 12.561,49.3 r90 top
J5 "807-22-001-10-006101" "POGO PIN 807-22-001-10-006101" 49.9,30.25 r180 bottom
J6 "USB-miniB" USB-miniB 8.25,37.5 r90 top
J7 "BC020-03-A-0200-0300-L-G" "JUMPER 3POS 1MM PITCH THT" 63.75,48.625 r0 top locked
J8 "807-22-001-10-006101" "POGO PIN 807-22-001-10-006101" 47.636,28 r180 bottom
J9 "Pogo_Pad" "POGO PAD SOLDIER" 41.5,28 r0 top
J10 "Jumper" "JUMPER 2POS 1MM PITCH THT" 28.5,46.25 r90 top
J11 "Jumper" "JUMPER 2POS 1MM PITCH THT" 28.5,34.5 r90 top
J12 "Jumper" "JUMPER 2POS 1MM PITCH THT" 28.5,22.25 r90 top
J13 "MMCX" "COAX MMCX SMD" 40,4.75 r0 top
J14 "66012002111503" "COAX MMCX THT" 67.38,10.805 r270 top locked
J15 "Jumper" "JUMPER 2POS 1MM PITCH THT" 3.5,25 r90 top
J16 "807-22-001-10-006101" "POGO PIN 807-22-001-10-006101" 45.4,30.25 r180 bottom
J17 "807-22-001-10-006101" "POGO PIN 807-22-001-10-006101" 45.4,25.75 r180 bottom
JACF "JACF" "JUMPER 2POS 1MM PITCH THT" 47.821,9.529 r180 top
JIVC "JIVC" "JUMPER 2POS 1MM PITCH THT" 47.821,6.279 r180 top
JLED "JLED" "JUMPER 2POS 1MM PITCH THT" 28.5,51.75 r90 top
JP "440054-4" "HEADER MALE 4x1 2MM PITCH THT" 62.875,35.575 r270 top locked
JTIA "JTIA" "JUMPER 2POS 1MM PITCH THT" 47.821,12.779 r180 top
K1 "118-A-5/2D" 118-A-5/2D#1 18.838,50.163 r0 top
K2 "118-A-5/2D" 118-A-5/2D#1 18.838,44.067 r0 top
K3 "118-A-5/2D" 118-A-5/2D#1 18.838,37.971 r0 top
K4 "118-A-5/2D" 118-A-5/2D#1 18.885,31.874 r0 top
K5 "118-A-5/2D" 118-A-5/2D#2 18.909,25.778 r0 top
K6 "118-A-5/2D" 118-A-5/2D#2 18.909,19.682 r0 top
K7 "118-A-5/2D" 118-A-5/2D#3 13.75,22.4 r90 top
K8 "118-A-5/2D" 118-A-5/2D#3 7.5,22.44 r90 top
L1 "10uH" "IND VLS3012CX-1 NONSTANDARD TDK" 58.025,44.7 r180 bottom
L2 "10uH" "IND VLS3012CX-1 NONSTANDARD TDK" 47.425,48.425 r180 bottom
Q1 "DMG2302UK" "SOT90-3 LOW DENSITY" 22.009,46.853 r180 bottom
Q2 "DMG2302UK" "SOT90-3 LOW DENSITY" 21.882,34.931 r180 bottom
Q3 "DMG2302UK" "SOT90-3 LOW DENSITY" 21.957,22.757 r180 bottom
Q4 "DMG2302UK" "SOT90-3 LOW DENSITY" 10.75,22.25 r90 bottom
R0 "TBD" "RES 0603 IPC MID DENSITY" 3.897,37.676 r0 top
R1 "10k" "RES 0603 IPC MID DENSITY" 59.021,7.204 r0 top
R2 "47R" "RES 0402 NON-IPC SEI" 62.071,6.446 r180 top
R3 "0R OPT" "RES 0402 IPC MID DENSITY" 66.125,30.375 r180 top
R4 "0R OPT" "RES 0402 IPC MID DENSITY" 66.125,29.375 r180 top
R5 "47R" "RES 0402 NON-IPC SEI" 66.125,28.4 r180 top
R6 "TBD OPT" "RES 0402 IPC MID DENSITY" 66.125,27.375 r180 top
R7 "TBD OPT" "RES 0402 IPC MID DENSITY" 66.125,26.375 r180 top
R8 "0R DNP" "RES 0603 IPC MID DENSITY" 61.75,26.75 r270 top
R9 "TBD OPT" "RES 0402 IPC MID DENSITY" 66.125,24.375 r180 top
R10 "TBD OPT" "RES 0402 IPC MID DENSITY" 66.125,23.375 r180 top
R11 "47R" "RES 0402 NON-IPC SEI" 66,22.25 r180 top
R12 "TBD OPT" "RES 0402 IPC MID DENSITY" 66,21 r180 top
R13 "TBD OPT" "RES 0402 IPC MID DENSITY" 66,20 r180 top
R14 "0R" "RES 0603 IPC MID DENSITY" 58.3,8.3 r0 bottom
R15 "100k" "RES 0603 IPC MID DENSITY" 55.5,7.5 r90 bottom
R16 "300k" "RES 0603 IPC MID DENSITY" 51.5,12.25 r90 bottom
R17 "10k" "RES 0603 IPC MID DENSITY" 50.6,9.75 r0 bottom
R18 "680R" "RES 0603 IPC MID DENSITY" 30.696,52.2 r90 top
R19 "47R" "RES 0603 IPC MID DENSITY" 41.75,43.25 r180 bottom
R20 "47R" "RES 0603 IPC MID DENSITY" 41.75,41.75 r180 bottom
R21 "10k" "RES 0603 IPC MID DENSITY" 57.15,24.025 r90 bottom
R22 "10k" "RES 0603 IPC MID DENSITY" 58.6,22.2 r90 bottom
R23 "2.32k" "RES 0603 IPC MID DENSITY" 58.05,26.425 r0 bottom
R24 "2.23k" "RES 0603 IPC MID DENSITY" 58.875,28.85 r270 bottom
R25 "47R" "RES 0402 NON-IPC SEI" 50.375,33.65 r270 bottom
R26 "47R" "RES 0402 NON-IPC SEI" 51.35,33.65 r270 bottom
R27 "0.1R" "RES 0402 NON-IPC YAGEO" 52.675,33.65 r90 bottom
R28 "0.1R" "RES 0402 NON-IPC YAGEO" 53.825,33.65 r90 bottom
R29 "30k" "RES 0805 IPC HIGH DENSITY" 53.875,50.8 r180 bottom
R30 "1k" "RES 0402 IPC LOW DENSITY YAGEO" 57.625,50.2 r90 bottom
R31 "1.5k" "RES 1206 NON-IPC VISHAY" 60.7,50.25 r180 bottom
R32 "110k" "RES 0603 IPC MID DENSITY" 39.4,49.05 r0 bottom
R33 "0R" "RES 0603 IPC MID DENSITY" 44.2,21.3 r270 top
R34 "100k" "RES 0603 IPC MID DENSITY" 41.75,44.75 r180 bottom
R35 "100k" "RES 0603 IPC MID DENSITY" 41.75,40.25 r180 bottom
R36 "47R" "RES 0603 IPC MID DENSITY" 27.092,46.853 r270 bottom
R37 "100k" "RES 0603 IPC MID DENSITY" 25.338,46.853 r270 bottom
R38 "47R" "RES 0603 IPC MID DENSITY" 10.75,17.5 r180 bottom
R39 "47R" "RES 0603 IPC MID DENSITY" 27.05,34.9 r270 bottom
R40 "100k" "RES 0603 IPC MID DENSITY" 25.3,34.75 r270 bottom
R41 "100k" "RES 0603 IPC MID DENSITY" 10.75,19 r180 bottom
R42 "47R" "RES 0603 IPC MID DENSITY" 27.04,22.757 r270 bottom
R43 "100k" "RES 0603 IPC MID DENSITY" 25.286,22.757 r270 bottom
R44 "10k" "RES 0603 IPC MID DENSITY" 37.75,13.5 r0 bottom
R45 "1Meg" "RES 1206 IPC MID DENSITY" 13.883,13.9 r0 top
R46 "10k" "RES 1206 IPC MID DENSITY" 13.883,19.25 r0 top
R47 "0R OPT" "RES 0603 IPC MID DENSITY" 34.75,15.25 r180 bottom
R48 "0R OPT" "RES 0603 IPC MID DENSITY" 34.75,13.5 r0 bottom
R49 "0R OPT" "RES 0603 IPC MID DENSITY" 34.5,6.5 r180 bottom
R50 "0R OPT" "RES 0603 IPC MID DENSITY" 34.5,8.25 r0 bottom
R51 "10k" "RES 0603 IPC MID DENSITY" 37.75,6.5 r0 bottom
R52 "1k" "RES 0603 IPC MID DENSITY" 60.5,41 r90 bottom
R53 "1k" "RES 0603 IPC MID DENSITY" 59.87,34.85 r180 bottom
R58 "0R OPT" "RES 0402 IPC LOW DENSITY" 28.35,26.95 r0 top
R59 "0R OPT" "RES 0402 IPC LOW DENSITY" 28.35,25.946 r0 top
R60 "0R OPT" "RES 0402 IPC LOW DENSITY" 28.35,24.941 r0 top
R61 "0R" "RES 0402 IPC MID DENSITY" 31,32.5 r180 top
R62 "5.11k" "RES 0402 IPC MID DENSITY" 36.75,16.25 r0 top
R63 "5.11k" "RES 0402 IPC MID DENSITY" 36.95,11.185 r0 top
R64 "47R" "RES 0402 NON-IPC SEI" 55.546,6.429 r270 top
R65 "47R" "RES 0402 NON-IPC SEI" 56.621,6.429 r270 top
R66 "10k" "RES 0603 IPC MID DENSITY" 67.2,44.75 r0 top
R67 "10k" "RES 0603 IPC MID DENSITY" 58.8,44.775 r0 top
R68 "33R" "RES 0402 NON-IPC YAGEO" 59.925,34.5 r90 top
R69 "33R" "RES 0402 NON-IPC YAGEO" 58.725,34.5 r90 top
R70 "33R" "RES 0402 NON-IPC YAGEO" 57.625,34.475 r90 top
R71 "0R A, C" "RES 0402 IPC MID DENSITY" 70.5,12 r90 top
R72 "0R A, B" "RES 0402 IPC MID DENSITY" 70.5,9.75 r90 top
R73 "2k" "RES 0603 IPC MID DENSITY" 47.321,14.279 r0 top
R74 "2k" "RES 0603 IPC MID DENSITY" 47.321,11.029 r0 top
R75 "2k" "RES 0603 IPC MID DENSITY" 47.321,7.779 r0 top
R76 "2k" "RES 0603 IPC MID DENSITY" 47.321,4.779 r0 top
R99 "0R" "RES 0402 IPC MID DENSITY" 71.25,38.75 r90 top
RT1 "NTC 0603 10K 1%" "RES 0603 IPC MID DENSITY" 3.75,12.5 r270 top value="NT 10K"
TP1 "Testpoint" "TESTPOINT THT" 28,12 r90 top
TP2 "Testpoint" "TESTPOINT THT" 28,10 r0 top
TP3 "Testpoint" "TESTPOINT THT" 19.5,10 r90 top
TP4 "Testpoint" "TESTPOINT THT" 43.749,3.129 r0 top
TP5 "Testpoint" "TESTPOINT THT" 28,14 r90 top
TP6 "Testpoint" "TESTPOINT THT" 19.5,14 r0 top
TP7 "Testpoint" "TESTPOINT THT" 19.5,12 r90 top
TP8 "Testpoint" "TESTPOINT THT" 59.6,14.5 r0 top
TP9 "Testpoint" "TESTPOINT THT" 52,4.25 r270 top
U1 "LMK1C1103PWR" "8-TSSOP 0.65MM PITCH 4.4MM WIDTH IPC MID DENSITY" 58.575,39.55 r270 top
U2 "ADS124S08IPBSR" "32TQFP 7X7MM IPC LOW DENSITY" 55.4,11.5 r0 top locked
U3 "LT3045" "12-TSOP 0.65MM PITCH 3MM WIDTH EP IPC MID DENSITY" 55.75,11.5 r180 bottom
U4 "ADP7142AUJZ-5.0-R7" "SOT23-5 HIGH DENSITY AD" 43.6,19.875 r270 bottom
U5 "OPA2182" "8-TSSOP 0.65MM PITCH 4.4MM WIDTH IPC MID DENSITY" 54.55,26.475 r270 bottom
U6 "ZXTC2045E6" "SOT23-6 NON-IPC DIODES" 51.975,36.675 r0 bottom
U7 "LM2611AMF/NOPB" "SOT23-5 MID DENSITY" 54.725,48.125 r0 bottom
U8 "LT3094EDD#PBF" "12DFN 3x3MM EP IPC MID DENSITY" 38.719,51.742 r180 bottom
U9 "DAC5311" "SOT363-6 MID DENSITY" 48,21 r180 top
U10 "REF5025" "8-TSOP 0.65MM PITCH 3MM WIDTH IPC MID DENSITY" 26.5,6.133 r0 top
U11 "SI2347DS-T1-GE3" SOT95P245X110-3N 62.5,44.5 r0 bottom
U12 "ISO7760DBQR" "16-SSOP 0.635MM PITCH 5.4MM WIDTH NON-IPC TI" 57,22 r180 top
U13 "OPA928DR" "8-SOIC 4MM WIDE MID DENSITY" 6.5,17 r0 top
U14 "SSM3J332R,LF" SOT95P245X110-3N 59.5,37.5 r90 bottom
U15 "IVC102/SO" "14-SOIC 4MM WIDE LOW DENSITY" 33.575,26.881 r0 top
U17 "LT1991AIMS" "10-SOP 0.5MM PITCH 3MM WIDTH IPC HIGH DENSITY" 35.175,18.49 r0 top
U18 "LT1991AIMS" "10-SOP 0.5MM PITCH 3MM WIDTH IPC HIGH DENSITY" 35.375,13.425 r0 top
U19 "SN74LVC1G139DCTT" DCT0008A_L 62.321,10.529 r0 top
U20 "ADP7142AUJZ-5.0-R7" "SOT23-5 HIGH DENSITY AD" 13.5,6.25 r180 top
Y1 "SIT1602Bx" "4PQFN NON-IPC SITIME" 68.625,41.3 r0 top

## Footprints (in the part's own frame and the unit in brackets; to place one, negate y for a bottom-side part, rotate by r counter-clockwise, add the part's x,y. Pads: shape width x height; smd on the part's side, far side on the other; paste and mask are expansions set on the pad)
"4PQFN NON-IPC SITIME" [mm] "FP-SiT1602-2-MFG"
  rect 1.2x1.4 smd paste+0 mask+0: 1(-0.95,1.1) 2(-0.95,-1.1) 3(0.95,-1.1) 4(0.95,1.1)
  silkscreen extent -2.22,-2.34 1.28,2.32, body extent -1.65,-1.9 1.65,1.9, height 0.25
"8-SOIC 4MM WIDE MID DENSITY" [mm]
  rect 1.525x0.65 smd: 1(-2.712,1.905) 2(-2.712,0.635) 3(-2.712,-0.635) 4(-2.712,-1.905) 5(2.712,-1.905) 6(2.712,-0.635) 7(2.712,0.635) 8(2.712,1.905)
  silkscreen extent -3.43,-2.45 1.6,2.92, body extent -3,-2.45 3,2.45, height 1.75
"8-TSOP 0.65MM PITCH 3MM WIDTH IPC MID DENSITY" [mm] "TSOP65P490X110-8N"
  oval 1.35x0.5 smd mask-0.02: 1(-2.225,1.025) 2(-2.225,0.345) 3(-2.225,-0.345) 4(-2.225,-1.025) 5(2.225,-1.025) 6(2.225,-0.345) 7(2.225,0.345) 8(2.225,1.025)
  silkscreen extent -3.15,-1.8 3.15,1.8, body extent -2.45,-1.55 2.45,1.55, height 1.1
"8-TSSOP 0.65MM PITCH 4.4MM WIDTH IPC MID DENSITY" [mm] "FP-PW0008A-IPC_B, Texas Instruments branding"
  rect 1.655x0.381 smd paste+0 mask+0: 1(-2.825,0.975)
  rrect100% 1.655x0.381 smd paste+0 mask+0: 2(-2.825,0.325) 3(-2.825,-0.325) 4(-2.825,-0.975) 5(2.825,-0.975) 6(2.825,-0.325) 7(2.825,0.325) 8(2.825,0.975)
  silkscreen extent -4.42,-1.5 1.5,1.5, body extent -3.9,-1.75 3.9,1.75, height 0.25
"10-SOP 0.5MM PITCH 3MM WIDTH IPC HIGH DENSITY" [mm] "SOP, 10-Leads, Body 3x3mm, Pitch 0.50mm, IPC High Density"
  oval 1.35x0.25 smd: 1(-2.1,1) 2(-2.1,0.5) 3(-2.1,0) 4(-2.1,-0.5) 5(-2.1,-1) 6(2.1,-1) 7(2.1,-0.5) 8(2.1,0) 9(2.1,0.5) 10(2.1,1)
  silkscreen extent -2.23,1.45 -2.08,1.6, body extent -2.45,-1.5 2.45,1.5, height 1.1
"12-TSOP 0.65MM PITCH 3MM WIDTH EP IPC MID DENSITY" [mm] "TSOP65P490X110_HS-13N"
  oval 1.35x0.5 smd mask-0.03: 1(-2.225,1.625) 2(-2.225,0.975) 3(-2.225,0.325) 4(-2.225,-0.325) 5(-2.225,-0.975) 6(-2.225,-1.625) 7(2.225,-1.625) 8(2.225,-0.975) 9(2.225,-0.325) 10(2.225,0.325) 11(2.225,0.975) 12(2.225,1.625)
  round 0.8 hole 0.5 mask-0.03: 13(0,-1) 13(0,0) 13(0,1)
  rect 1.76x2.95 smd: 13(0,0)
  silkscreen extent -3.15,-2.34 3.15,2.95, body extent -2.45,-2.05 2.45,2.05, height 1.1
"12DFN 3x3MM EP IPC MID DENSITY" [mm] "Exposed pad, Analog Devices logo"
  rect 0.831x0.222 smd paste+0 mask+0: 1(-1.441,1.125)
  rrect100% 0.831x0.222 smd paste+0 mask+0: 2(-1.441,0.675) 3(-1.441,0.225) 4(-1.441,-0.225) 5(-1.441,-0.675) 6(-1.441,-1.125) 7(1.441,-1.125) 8(1.441,-0.675) 9(1.441,-0.225) 10(1.441,0.225) 11(1.441,0.675) 12(1.441,1.125)
  rect 1.75x2.48 smd paste-1000 mask-0.05: 13(0,0)
  silkscreen extent -2.53,1 -2.28,1.25, body extent -1.5,-1.5 1.5,1.5, height 0.8
"14-SOIC 4MM WIDE LOW DENSITY" [mm]
  rrect15% 1.65x0.65 smd: 1(-2.825,3.81) 2(-2.825,2.54) 3(-2.825,1.27) 4(-2.825,0) 5(-2.825,-1.27) 6(-2.825,-2.54) 7(-2.825,-3.81) 8(2.825,-3.81) 9(2.825,-2.54) 10(2.825,-1.27) 11(2.825,0) 12(2.825,1.27) 13(2.825,2.54) 14(2.825,3.81)
  silkscreen extent -1.69,4.75 -1.44,5, body extent -3.02,-4.32 3.02,4.32, height 1.59
"16-SSOP 0.635MM PITCH 5.4MM WIDTH NON-IPC TI" [mm]
  rect 1.6x0.41 smd mask+0: 1(-2.7,2.222) 2(-2.7,1.587) 3(-2.7,0.952) 4(-2.7,0.317) 5(-2.7,-0.318) 6(-2.7,-0.953) 7(-2.7,-1.588) 8(-2.7,-2.223) 9(2.7,-2.222) 10(2.7,-1.587) 11(2.7,-0.952) 12(2.7,-0.317) 13(2.7,0.318) 14(2.7,0.953) 15(2.7,1.588) 16(2.7,2.223)
  silkscreen extent -3.75,-2.93 3.75,2.93, body extent -3,-2.48 2.99,2.42, height 1.75
"32TQFP 7X7MM IPC LOW DENSITY" [mm] "TSQFP50P700X700X120-32M"
  oval 1.6x0.3 smd mask-0.035: 1(-3.1,1.75) 2(-3.1,1.25) 3(-3.1,0.75) 4(-3.1,0.25) 5(-3.1,-0.25) 6(-3.1,-0.75) 7(-3.1,-1.25) 8(-3.1,-1.75) 17(3.1,-1.75) 18(3.1,-1.25) 19(3.1,-0.75) 20(3.1,-0.25) 21(3.1,0.25) 22(3.1,0.75) 23(3.1,1.25) 24(3.1,1.75)
  oval 0.3x1.6 smd mask-0.035: 9(-1.75,-3.1) 10(-1.25,-3.1) 11(-0.75,-3.1) 12(-0.25,-3.1) 13(0.25,-3.1) 14(0.75,-3.1) 15(1.25,-3.1) 16(1.75,-3.1) 25(1.75,3.1) 26(1.25,3.1) 27(0.75,3.1) 28(0.25,3.1) 29(-0.25,3.1) 30(-0.75,3.1) 31(-1.25,3.1) 32(-1.75,3.1)
  silkscreen extent -3.22,0.8 -0.8,2.57, body extent -3.5,-3.5 3.5,3.5, height 1.2
118-A-5/2D#1 [mm]
  round 1 hole 0.6: 1(0,0) 2(1.52,0)
  round 1 hole 0.6 mask+0.6: 3(4.06,0) 4(6.6,0)
  silkscreen extent -1.78,-2.79 7.75,2.79, body extent -0.76,-2.4 7.37,2.4, height 14.73
118-A-5/2D#2 [mm]
  round 1 hole 0.6: 1(0,0) 2(1.52,0) 3(4.06,0) 4(6.6,0)
  silkscreen extent -1.78,-2.79 7.75,2.79, body extent -0.76,-2.4 7.37,2.4, height 14.73
118-A-5/2D#3 [mm]
  round 1 hole 0.6: 1(0,0) 2(1.52,0)
  round 1 hole 0.6 mask+0.8: 3(4.06,0) 4(6.6,0)
  silkscreen extent -1.78,-2.79 4.9,2.65, body extent -0.76,-2.4 7.37,2.4, height 14.73
"CAP 0603 IPC MID DENSITY" [mm]
  rrect25% 1.1x1 smd: 1(-0.85,0) 2(0.85,0)
  silkscreen extent -0.15,-0.7 0.15,0.7, body extent -0.8,-0.4 0.8,0.4, height 0.3
"CAP 0603 NON-IPC KEMET X7R" [mm]
  rect 0.75x0.9 smd paste+0 mask+0: 1(-0.6,0) 2(0.6,0)
  body extent -1.2,-0.6 1.2,0.6, height 0.25
"CAP 0805 IPC MID DENSITY" [mm]
  rect 1.15x1.45 smd paste+0 mask+0: 1(-0.9,0) 2(0.9,0)
  silkscreen extent -1.48,-0.97 1.48,0.97, body extent -1,-0.7 1,0.7, height 1.22
"CAP 0805 NON-IPC KEMET X5R" [mm]
  rect 0.95x1.35 smd paste+0 mask+0: 1(-0.75,0) 2(0.75,0)
  silkscreen extent -1.1,-1.05 1.1,1.05, body extent -1,-0.63 1,0.63, height 1.4
"CAP 1206 IPC LOW DENSITY" [mm]
  rrect25% 1.1x1.6 smd: 1(-1.55,0) 2(1.55,0)
  silkscreen extent -2.67,-1.2 2.67,1.17, body extent -1.7,-0.9 1.7,0.9, height 1.8
"CAP 1206 NON-IPC KEMET NP0" [mm]
  rect 0.95x1.7 smd paste+0 mask+0: 1(-1.4,0) 2(1.4,0)
  body extent -1.6,-0.8 1.6,0.8, height 0.88
"CAP 1206 UNKNOWN" [mm] "Ceramic Capacitors, body 3.2x1.6mm, WCAP-CSGP_1206_L3.2W1.6H0.8"
  rect 0.9x1.6 smd: 1(-1.55,0) 2(1.55,0)
  body extent -1.6,-0.8 1.6,0.8, height 0.8
"COAX MMCX SMD" [mm] "50Ohm, female jack"
  round 0.89 smd: 1(0,0)
  rrect25% 1.15x1.15 smd: 2(-1.425,-1.425) 2(-1.425,1.425) 2(1.425,-1.425) 2(1.425,1.425)
  silkscreen extent -1.91,-1.91 1.91,1.91, body extent -1.73,-1.73 1.73,1.73, height 5
"COAX MMCX THT" [mm] "50Ohm, 6GHz max, female jack, Wurth Elektronik 66012002111503"
  round 1.3 hole 0.8: 1(0,0) 2(-1.27,1.27) 3(1.27,1.27) 4(1.27,-1.27) 5(-1.27,-1.27)
  silkscreen extent -1.75,-1.75 1.75,1.75, body extent -1.75,-1.75 1.75,1.75, height 4.5
"COAX SMA THT" [mm] "50Ohm, 18GHz max, female jack, Wurth Elektronik 60312002114503"
  round 2.325 hole 1.55: 1(0,0)
  round 2.625 hole 1.75: 2(-2.54,-2.54) 3(-2.54,2.54) 4(2.54,-2.54) 5(2.54,2.54)
  silkscreen extent -1.2,-3.5 1.2,3.5, body extent -3.5,-3.5 3.5,3.5, height 10.19
DCT0008A_L [mm] "SOP, 8-Leads, Body 2.9x3.2mm, Pitch 0.65mm, IPC High Density"
  rrect25% 0.85x0.4 smd: 1(-1.875,0.975) 2(-1.875,0.325) 3(-1.875,-0.325) 4(-1.875,-0.975) 5(1.875,-0.975) 6(1.875,-0.325) 7(1.875,0.325) 8(1.875,0.975)
  silkscreen extent -2,-1.6 1.05,1.85, body extent -2.01,-1.47 2.01,1.48, height 1.3
"DO-214AC SMA VISHAY" [mm]
  rect 1.88x1.52 smd mask+0: 1(-1.93,0) 2(1.93,0)
  silkscreen extent -2.82,-1.55 2.1,1.63, body extent -2.55,-1.33 2.55,1.33, height 2.29
"HEADER MALE 4x1 2MM PITCH THT" [mm]
  rect 1.35x1.35 hole 0.9: 1(0,0)
  round 1.35 hole 0.9: 2(-2,0) 3(-4,0) 4(-6,0)
  silkscreen extent -8.3,-1.95 2,3.05, body extent -7.95,-1.6 2.05,3.1, height 6.05
"HEADER MALE 10X2 1.27MM PITCH FTSH" [mil]
  rect 29x110 smd: 01(225,-67.48) 02(225,67.5) 03(175,-67.48) 04(175,67.5) 05(125,-67.48) 06(125,67.5) 07(75,-67.48) 08(75,67.5) 09(25,-67.48) 10(25,67.5) 11(-25,-67.48) 12(-25,67.5) 13(-75,-67.48) 14(-75,67.5) 15(-125,-67.48) 16(-125,67.5) 17(-175,-67.48) 18(-175,67.5) 19(-225,-67.48) 20(-225,67.5)
  silkscreen extent -258,-152 259,92, body extent -250,-115 250,115, height 180
"HEADER MALE 20x1 1MM PITCH SMD" [mm]
  rect 0.55x1.7 smd: 1(-9.675,-1.35) 2(-8.675,-1.35) 3(-7.675,-1.35) 4(-6.675,-1.35) 5(-5.675,-1.35) 6(-4.675,-1.35) 7(-3.675,-1.35) 8(-2.675,-1.35) 9(-1.675,-1.35) 10(-0.675,-1.35) 11(0.325,-1.35) 12(1.325,-1.35) 13(2.325,-1.35) 14(3.325,-1.35) 15(4.325,-1.35) 16(5.325,-1.35) 17(6.325,-1.35) 18(7.325,-1.35) 19(8.325,-1.35) 20(9.325,-1.35)
  rect 1.5x1.45 smd: MP1(-11.225,-1.455) MP2(11.225,-1.455) MP3(-11.225,1.455) MP5(11.225,1.455)
  rect 2.5x0.65 smd: MP4(0,0.975)
  silkscreen extent -10.13,0.78 10.13,0.78, body extent -11.95,-1.91 11.95,1.89, height 5.22
"IND VLS3012CX-1 NONSTANDARD TDK" [mm]
  rect 1.2x3 smd mask+0: 1(-1.1,0) 2(1.1,0)
  silkscreen extent -0.22,-1.75 0.22,1.75, body extent -1.5,-1.51 1.5,1.51, height 1.19
"JUMPER 2POS 1MM PITCH THT" [mm] "GCT BC020-02-A-0200-0300-L-G"
  round 0.8 hole 0.5: 1(0,0) 2(1,0)
  body extent -0.5,-0.64 1.5,0.64, height 3
"JUMPER 3POS 1MM PITCH THT" [mm] "GCT BC020-03-A-0200-0300-L-G"
  round 0.75 hole 0.5: 1(-1,0) 2(0,0) 3(1,0)
  body extent -1.5,-0.64 1.5,0.64, height 4.3
"LED 0603 MID DENSITY" [mm]
  rrect25% 1x1 smd: 1(0.8,0) 2(-0.8,0)
  silkscreen extent 1.46,-0.76 1.56,-0.66, body extent -0.8,-0.4 0.8,0.4, height 0.7
"M3 PTH FOR 4.5MM HEX" [mm] "M3 plated through hole; oversized for 4.5mm hex standoffs"
  round 6.5 hole 3.5: 1(0,0)
"POGO PAD SOLDIER" [mm]
  round 2.8 smd far side: 1(0,0)
"POGO PIN 807-22-001-10-006101" [mm] "Mill-Max 807-22-001-10-006101 Insulated Discrete Pogo Pin 5.99mm init height 2.79mm diameter"
  round 1.3 hole 0.6: 1(0,0)
  silkscreen extent -1.4,-1.4 1.4,1.4, body extent -1.39,-1.39 1.39,1.39, height 5.99
"POLYFUSE 1812 NON-IPC BELFUSE" [mm]
  rect 1.78x3.5 smd mask+0: 1(-2.615,0) 2(2.615,0)
  silkscreen extent -1.35,-1.75 1.35,1.75, body extent -2.27,-1.62 2.27,1.62, height 0.7
"RES 0402 IPC LOW DENSITY" [mm]
  rect 0.7x0.65 smd: 1(-0.475,0) 2(0.475,0)
  body extent -0.53,-0.27 0.53,0.28, height 0.4
"RES 0402 IPC LOW DENSITY YAGEO" [mm]
  rect 0.715x0.672 smd paste+0 mask+0: 1(-0.479,0) 2(0.479,0)
  silkscreen extent -0.84,-0.74 0.84,0.74, body extent -0.5,-0.25 0.5,0.25, height 0.4
"RES 0402 IPC MID DENSITY" [mm] "Chip Resistor, 2-Leads, Body 1.00x0.50mm, IPC Medium Density"
  rect 0.6x0.55 smd: 1(-0.425,0) 2(0.425,0)
  body extent -0.53,-0.27 0.53,0.28, height 0.4
"RES 0402 NON-IPC SEI" [mm]
  rect 0.5x0.6 smd paste+0 mask+0: 1(-0.5,0) 2(0.5,0)
  body extent -0.85,-0.4 0.85,0.4, height 0.25
"RES 0402 NON-IPC YAGEO" [mm]
  rect 0.5x0.6 smd paste+0 mask+0: 1(-0.5,0) 2(0.5,0)
  body extent -0.5,-0.25 0.5,0.25, height 0.4
"RES 0603 IPC MID DENSITY" [mm]
  rrect25% 1.1x1 smd: 1(-0.85,0) 2(0.85,0)
  silkscreen extent -0.15,-0.7 0.15,0.7, body extent -0.77,-0.43 0.78,0.43, height 0.44
"RES 0805 IPC HIGH DENSITY" [mm] "Chip Resistor, 2-Leads, Body 2.00x1.25mm, IPC High Density"
  rect 1x1.35 smd: 1(-0.75,0) 2(0.75,0)
  body extent -1.1,-0.72 1.1,0.72, height 0.6
"RES 1206 IPC MID DENSITY" [mm] "Chip Resistor, 2-Leads, Body 3.13x1.55mm, IPC Medium Density"
  rect 1.2x1.65 smd: 1(-1.4,0) 2(1.4,0)
  body extent -1.6,-0.8 1.6,0.8, height 0.6
"RES 1206 NON-IPC VISHAY" [mm]
  rect 1.15x1.75 smd paste+0 mask+0: 1(-1.325,0) 2(1.325,0)
  silkscreen extent -0.38,-0.87 0.38,0.87, body extent -1.6,-0.8 1.6,0.8, height 0.65
"SOD-123 ONSEMI SMALL PADS" [mm]
  rect 0.9x0.95 smd paste+0 mask+0: 1(-1.68,0)
  rrect100% 0.9x0.95 smd paste+0 mask+0: 2(1.68,0)
  silkscreen extent -2.28,-0.8 1.35,1.14, body extent -1.84,-0.8 1.84,0.8, height 1.35
"SOT23-5 HIGH DENSITY AD" [mm] "FP-UJ-5-IPC_C"
  rect 1.254x0.532 smd paste+0 mask+0: 1(-1.05,0.95)
  rrect100% 1.254x0.532 smd paste+0 mask+0: 2(-1.05,0) 3(-1.05,-0.95) 4(1.05,-0.95) 5(1.05,0.95)
  silkscreen extent -1.4,-1.7 1.4,1.75, body extent -1.4,-1.45 1.4,1.45, height 1
"SOT23-5 MID DENSITY" [mm] "SOT23, 5-Leads, Body 3.05x1.75mm, Pitch 0.95mm, IPC Medium Density"
  rrect17% 1x0.6 smd: 1(-1.375,0.95) 2(-1.375,0) 3(-1.375,-0.95) 4(1.375,-0.95) 5(1.375,0.95)
  silkscreen extent -1.5,-1.55 0.5,1.92, body extent -1.42,-1.46 1.42,1.46, height 1.08
"SOT23-6 NON-IPC DIODES" [mm]
  rect 1x0.55 smd mask+0: 1(-1.4,0.95)
  rrect50% 1x0.55 smd mask+0: 2(-1.4,0) 3(-1.4,-0.95) 4(1.4,-0.95) 5(1.4,0) 6(1.4,0.95)
  silkscreen extent -1.53,-1.55 0.5,1.93, body extent -1.49,-1.54 1.51,1.56, height 1.4
"SOT90-3 LOW DENSITY" [mm] "SOT90P240X110-3M"
  rrect25% 1.15x0.65 smd: 1(-1.275,0.9) 2(-1.275,-0.9) 3(1.275,0)
  silkscreen extent -2.18,-1.83 2.16,1.8, body extent -1.25,-1.5 1.25,1.5, height 1.1
SOT95P245X110-3N [mm] "SOT23, 3-Leads, Body 2.90x2.45mm, Pitch 0.95mm, IPC Medium Density"
  rect 1x0.6 smd: 1(-1.2,0.95) 2(-1.2,-0.95) 3(1.2,0)
  silkscreen extent -1.32,-1.5 0.7,1.92, body extent -0.7,-1.5 0.7,1.5, height 1.1
"SOT363-6 MID DENSITY" [mm] "Technically non-IPC, adapted from TI datasheet for SOTx311 chips"
  rect 0.9x0.4 smd paste+0 mask+0: 1(-1.1,0.65)
  rrect25% 0.9x0.4 smd paste+0 mask+0: 2(-1.1,0) 3(-1.1,-0.65) 4(1.1,-0.65) 5(1.1,0) 6(1.1,0.65)
  silkscreen extent -1.18,-1.22 0.7,1.32, body extent -1.05,-1 1.05,1, height 1
"TESTPOINT THT" [mm]
  round 1 hole 0.5: 1(0,0)
USB-miniB [mm]
  oval 1.1x1.7 hole 0.7: 1(1.6,1.3) 3(0,1.3) 5(-1.6,1.3)
  oval 1x1.6 hole 0.7: 2(0.8,-1.3)
  oval 0.8x1.7 hole 0.7: 4(-0.8,-1.3)
  oval 1.4x3.9 hole 0.65 slot 2.4 at 90 deg: 6(-3.65,0) 6(3.65,0)
  body extent -4.15,-2.4 4.15,2.3, height 7.9